# EAGLE board ffc_adapter_panel (EAGLE 9.4.2), part 1 of 2
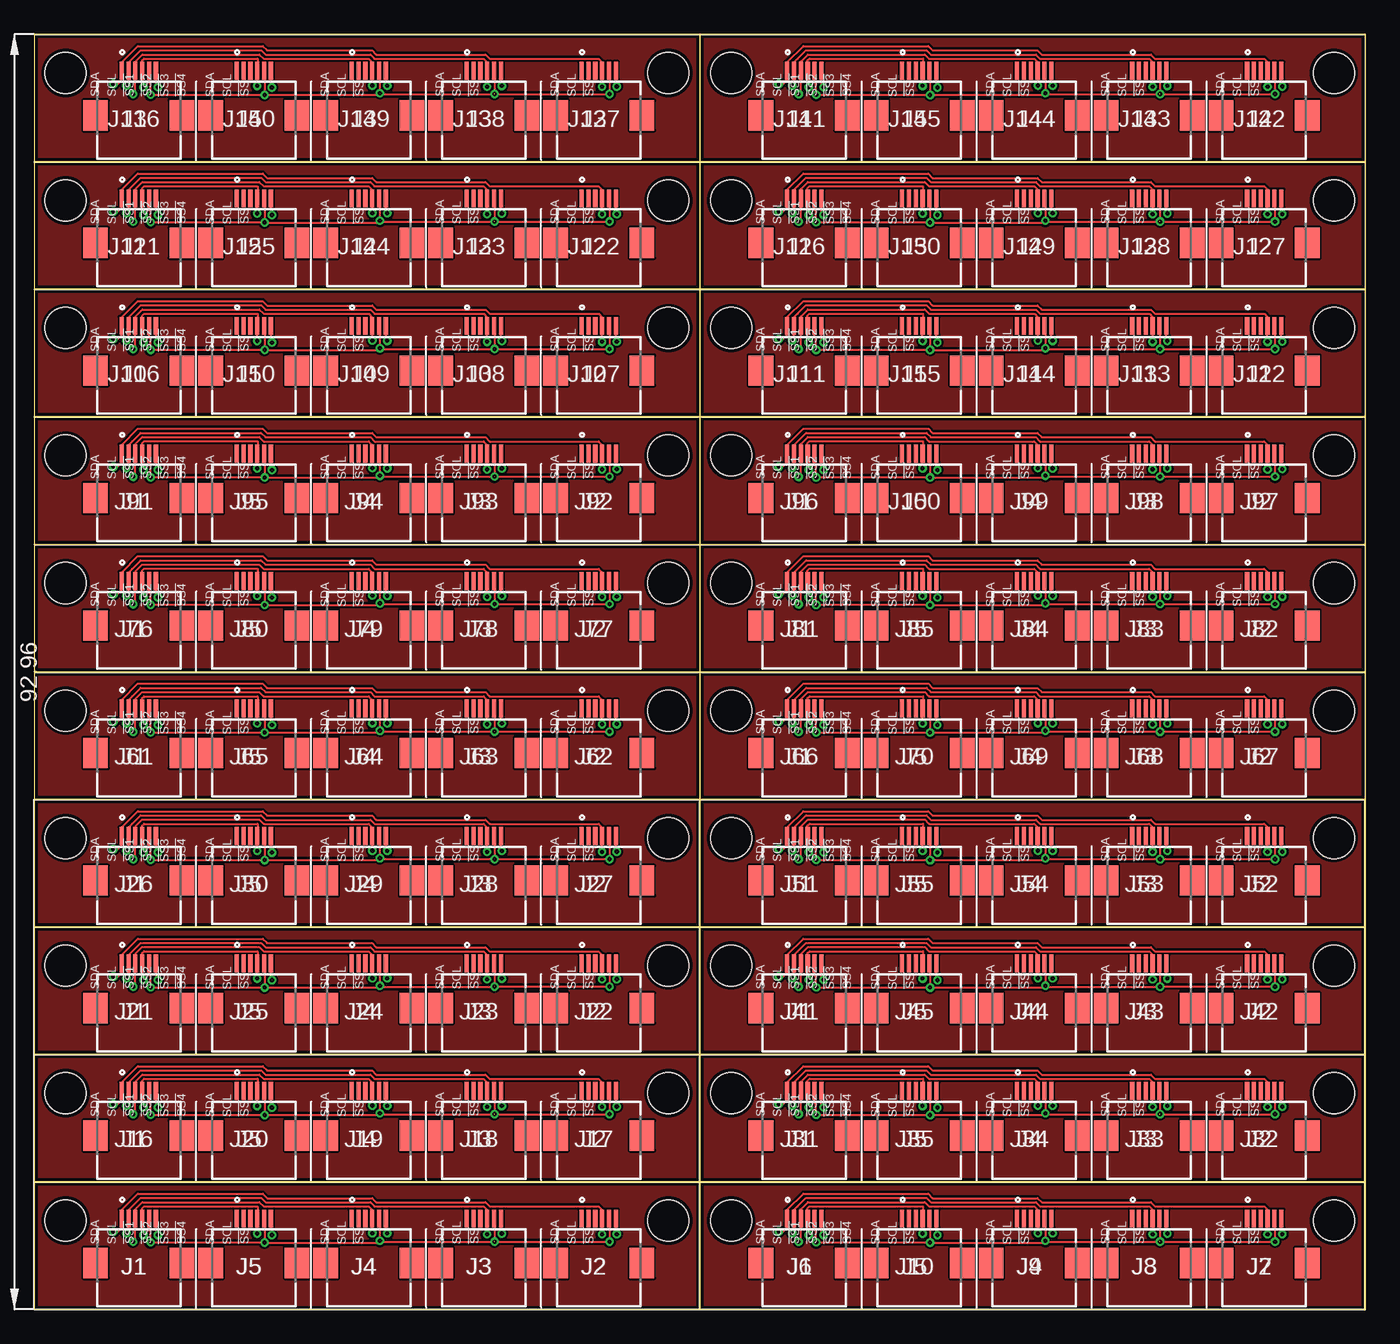
[diagram p0: board, top side]
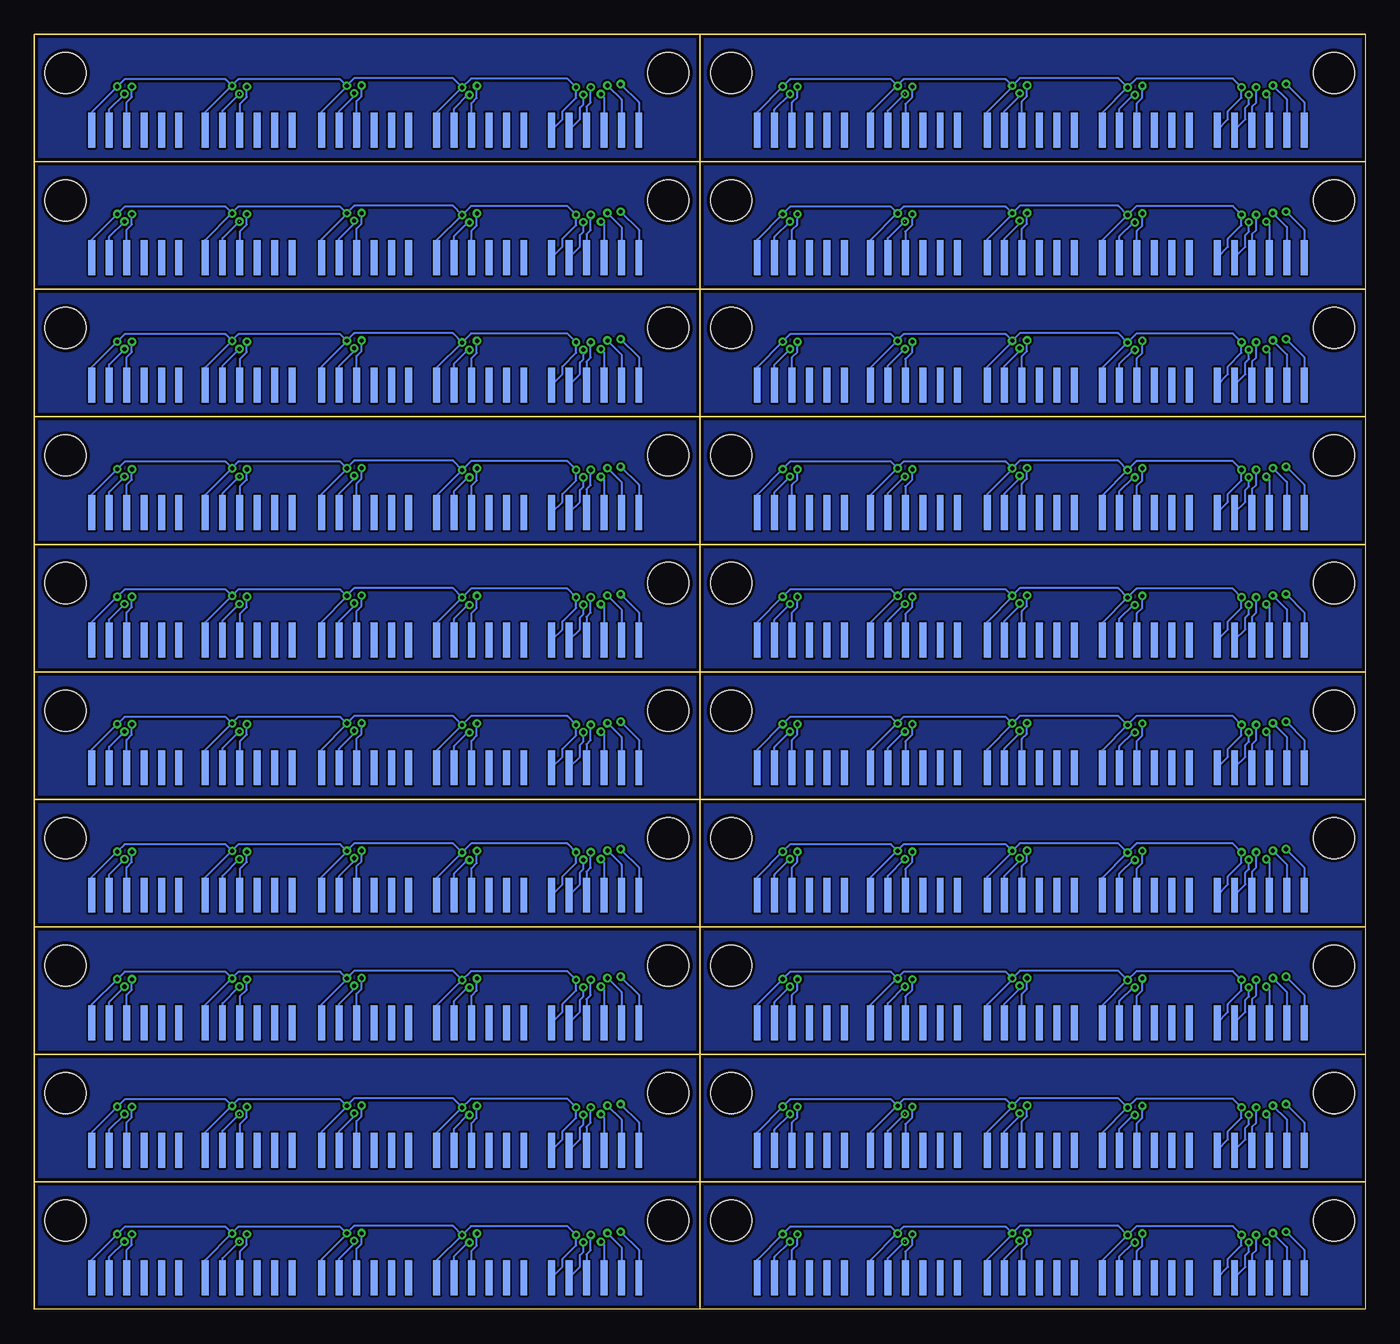
[diagram p1: board, bottom side, seen from below]

Size 97.03 x 92.96 mm. Coordinates in mm from the lower left corner, seen from the top.
Outline: 48.51,0 0,0 0,9.3
Outline: 48.51,0 48.51,9.3
Outline: 48.51,9.3 0,9.3
Outline: 48.51,0 97.03,0
Outline: 97.03,0 97.03,9.3
Outline: 97.03,9.3 48.51,9.3
Outline: 48.51,9.3 48.51,0
Outline: 97.03,9.3 97.03,0
Outline: 0,9.3 48.51,9.3
Outline: 48.51,9.3 48.51,18.59
Outline: 48.51,18.59 0,18.59
Outline: 0,18.59 0,9.3
Outline: 0,18.59 48.51,18.59
Outline: 48.51,18.59 48.51,27.89
Outline: 48.51,27.89 0,27.89
Outline: 0,27.89 0,18.59
Outline: 0,27.89 48.51,27.89
Outline: 48.51,27.89 48.51,37.19
Outline: 48.51,37.19 0,37.19
Outline: 0,37.19 0,27.89
Outline: 48.51,9.3 97.03,9.3
Outline: 97.03,9.3 97.03,18.59
Outline: 97.03,18.59 48.51,18.59
Outline: 48.51,18.59 48.51,9.3
Outline: 97.03,18.59 97.03,9.3
Outline: 48.51,18.59 97.03,18.59
Outline: 97.03,18.59 97.03,27.89
Outline: 97.03,27.89 48.51,27.89
Outline: 48.51,27.89 48.51,18.59
Outline: 97.03,27.89 97.03,18.59
Outline: 48.51,27.89 97.03,27.89
Outline: 97.03,27.89 97.03,37.19
Outline: 97.03,37.19 48.51,37.19
Outline: 48.51,37.19 48.51,27.89
Outline: 97.03,37.19 97.03,27.89
Outline: 0,37.19 48.51,37.19
Outline: 48.51,37.19 48.51,46.48
Outline: 48.51,46.48 0,46.48
Outline: 0,46.48 0,37.19
Outline: 48.51,37.19 97.03,37.19
Outline: 97.03,37.19 97.03,46.48
Outline: 97.03,46.48 48.51,46.48
Outline: 48.51,46.48 48.51,37.19
Outline: 97.03,46.48 97.03,37.19
Outline: 0,46.48 48.51,46.48
Outline: 48.51,46.48 48.51,55.78
Outline: 48.51,55.78 0,55.78
Outline: 0,55.78 0,46.48
Outline: 48.51,46.48 97.03,46.48
Outline: 97.03,46.48 97.03,55.78
Outline: 97.03,55.78 48.51,55.78
Outline: 48.51,55.78 48.51,46.48
Outline: 97.03,55.78 97.03,46.48
Outline: 0,55.78 48.51,55.78
Outline: 48.51,55.78 48.51,65.08
Outline: 48.51,65.08 0,65.08
Outline: 0,65.08 0,55.78
Outline: 48.51,55.78 97.03,55.78
Outline: 97.03,55.78 97.03,65.08
Outline: 97.03,65.08 48.51,65.08
Outline: 48.51,65.08 48.51,55.78
Outline: 97.03,65.08 97.03,55.78
Outline: 0,65.08 48.51,65.08
Outline: 48.51,65.08 48.51,74.37
Outline: 48.51,74.37 0,74.37
Outline: 0,74.37 0,65.08
Outline: 48.51,65.08 97.03,65.08
Outline: 97.03,65.08 97.03,74.37
Outline: 97.03,74.37 48.51,74.37
Outline: 48.51,74.37 48.51,65.08
Outline: 97.03,74.37 97.03,65.08
Outline: 0,74.37 48.51,74.37
Outline: 48.51,74.37 48.51,83.67
Outline: 48.51,83.67 0,83.67
Outline: 0,83.67 0,74.37
Outline: 48.51,74.37 97.03,74.37
Outline: 97.03,74.37 97.03,83.67
Outline: 97.03,83.67 48.51,83.67
Outline: 48.51,83.67 48.51,74.37
Outline: 97.03,83.67 97.03,74.37
Outline: 0,83.67 48.51,83.67
Outline: 48.51,83.67 48.51,92.96
Outline: 48.51,92.96 0,92.96
Outline: 0,92.96 0,83.67
Outline: 48.51,83.67 97.03,83.67
Outline: 97.03,83.67 97.03,92.96
Outline: 97.03,92.96 48.51,92.96
Outline: 48.51,92.96 48.51,83.67
Outline: 97.03,92.96 97.03,83.67
Outline: 0,92.96 48.51,92.96
Outline: 48.51,92.96 97.03,92.96
Copper layers (1*16): Top 0.035mm / dielectric 1.5mm / Bottom 0.035mm
Design rules "SeeedStudio_2layer_DRU_no_angle_20140221": minimum track width 6mil, minimum drill 12mil, track to track 6mil, track to pad 6mil, pad to pad 6mil, via to via 6mil, smd to smd 0mil, copper to edge 10mil, drill to drill 10mil, minimum pad ring 10mil, minimum via ring 6mil, stop-mask expansion 2mil, vias tented up to drill 100mil, thermal gap 10mil
Holes 3 mm at 2.29,6.48 46.23,6.48 50.8,6.48 94.74,6.48 2.29,15.77 46.23,15.77 2.29,25.07 46.23,25.07 2.29,34.37 46.23,34.37 50.8,15.77 94.74,15.77 50.8,25.07 94.74,25.07 50.8,34.37 94.74,34.37 2.29,43.66 46.23,43.66 50.8,43.66 94.74,43.66 2.29,52.96 46.23,52.96 50.8,52.96 94.74,52.96 2.29,62.26 46.23,62.26 50.8,62.26 94.74,62.26 2.29,71.55 46.23,71.55 50.8,71.55 94.74,71.55 2.29,80.85 46.23,80.85 50.8,80.85 94.74,80.85 2.29,90.14 46.23,90.14 50.8,90.14 94.74,90.14

## Footprints (pad centres in the part's own frame; a part is rotated, then mirrored left to right if it is on the bottom)
FH12-6S-0.5SH(55)_1 = smd 0.3 x 1.3: 1 -1.25,0; 2 -0.75,0; 3 -0.25,0; 4 0.25,0; 5 0.75,0; 6 1.25,0 | smd 1.8 x 2.2: 7 -3.15,-3.25; 8 3.15,-3.25
6PIN_SOLDER_PAD = smd 0.508 x 2.54: P$1 0,0; P$2 1.27,0; P$3 2.54,0; P$4 3.81,0; P$5 5.08,0; P$6 6.35,0

## Placement (x,y rotation side)
J1  FH12-6S-0.5SH(55)  [FH12-6S-0.5SH(55)_1]  7.62,6.63 0 top
J2  FH12-6S-0.5SH(55)  [FH12-6S-0.5SH(55)_1]  41.15,6.63 0 top
J3  FH12-6S-0.5SH(55)  [FH12-6S-0.5SH(55)_1]  32.77,6.63 0 top
J4  FH12-6S-0.5SH(55)  [FH12-6S-0.5SH(55)_1]  24.38,6.63 0 top
J5  FH12-6S-0.5SH(55)  [FH12-6S-0.5SH(55)_1]  16,6.63 0 top
J6  FH12-6S-0.5SH(55)  [FH12-6S-0.5SH(55)_1]  56.13,6.63 0 top
J7  FH12-6S-0.5SH(55)  [FH12-6S-0.5SH(55)_1]  89.66,6.63 0 top
J8  FH12-6S-0.5SH(55)  [FH12-6S-0.5SH(55)_1]  81.28,6.63 0 top
J9  FH12-6S-0.5SH(55)  [FH12-6S-0.5SH(55)_1]  72.9,6.63 0 top
J10  FH12-6S-0.5SH(55)  [FH12-6S-0.5SH(55)_1]  64.52,6.63 0 top
J16  FH12-6S-0.5SH(55)  [FH12-6S-0.5SH(55)_1]  7.62,15.93 0 top
J17  FH12-6S-0.5SH(55)  [FH12-6S-0.5SH(55)_1]  41.15,15.93 0 top
J18  FH12-6S-0.5SH(55)  [FH12-6S-0.5SH(55)_1]  32.77,15.93 0 top
J19  FH12-6S-0.5SH(55)  [FH12-6S-0.5SH(55)_1]  24.38,15.93 0 top
J20  FH12-6S-0.5SH(55)  [FH12-6S-0.5SH(55)_1]  16,15.93 0 top
J21  FH12-6S-0.5SH(55)  [FH12-6S-0.5SH(55)_1]  7.62,25.22 0 top
J22  FH12-6S-0.5SH(55)  [FH12-6S-0.5SH(55)_1]  41.15,25.22 0 top
J23  FH12-6S-0.5SH(55)  [FH12-6S-0.5SH(55)_1]  32.77,25.22 0 top
J24  FH12-6S-0.5SH(55)  [FH12-6S-0.5SH(55)_1]  24.38,25.22 0 top
J25  FH12-6S-0.5SH(55)  [FH12-6S-0.5SH(55)_1]  16,25.22 0 top
J26  FH12-6S-0.5SH(55)  [FH12-6S-0.5SH(55)_1]  7.62,34.52 0 top
J27  FH12-6S-0.5SH(55)  [FH12-6S-0.5SH(55)_1]  41.15,34.52 0 top
J28  FH12-6S-0.5SH(55)  [FH12-6S-0.5SH(55)_1]  32.77,34.52 0 top
J29  FH12-6S-0.5SH(55)  [FH12-6S-0.5SH(55)_1]  24.38,34.52 0 top
J30  FH12-6S-0.5SH(55)  [FH12-6S-0.5SH(55)_1]  16,34.52 0 top
J31  FH12-6S-0.5SH(55)  [FH12-6S-0.5SH(55)_1]  56.13,15.93 0 top
J32  FH12-6S-0.5SH(55)  [FH12-6S-0.5SH(55)_1]  89.66,15.93 0 top
J33  FH12-6S-0.5SH(55)  [FH12-6S-0.5SH(55)_1]  81.28,15.93 0 top
J34  FH12-6S-0.5SH(55)  [FH12-6S-0.5SH(55)_1]  72.9,15.93 0 top
J35  FH12-6S-0.5SH(55)  [FH12-6S-0.5SH(55)_1]  64.52,15.93 0 top
J41  FH12-6S-0.5SH(55)  [FH12-6S-0.5SH(55)_1]  56.13,25.22 0 top
J42  FH12-6S-0.5SH(55)  [FH12-6S-0.5SH(55)_1]  89.66,25.22 0 top
J43  FH12-6S-0.5SH(55)  [FH12-6S-0.5SH(55)_1]  81.28,25.22 0 top
J44  FH12-6S-0.5SH(55)  [FH12-6S-0.5SH(55)_1]  72.9,25.22 0 top
J45  FH12-6S-0.5SH(55)  [FH12-6S-0.5SH(55)_1]  64.52,25.22 0 top
J51  FH12-6S-0.5SH(55)  [FH12-6S-0.5SH(55)_1]  56.13,34.52 0 top
J52  FH12-6S-0.5SH(55)  [FH12-6S-0.5SH(55)_1]  89.66,34.52 0 top
J53  FH12-6S-0.5SH(55)  [FH12-6S-0.5SH(55)_1]  81.28,34.52 0 top
J54  FH12-6S-0.5SH(55)  [FH12-6S-0.5SH(55)_1]  72.9,34.52 0 top
J55  FH12-6S-0.5SH(55)  [FH12-6S-0.5SH(55)_1]  64.52,34.52 0 top
J61  FH12-6S-0.5SH(55)  [FH12-6S-0.5SH(55)_1]  7.62,43.81 0 top
J62  FH12-6S-0.5SH(55)  [FH12-6S-0.5SH(55)_1]  41.15,43.81 0 top
J63  FH12-6S-0.5SH(55)  [FH12-6S-0.5SH(55)_1]  32.77,43.81 0 top
J64  FH12-6S-0.5SH(55)  [FH12-6S-0.5SH(55)_1]  24.38,43.81 0 top
J65  FH12-6S-0.5SH(55)  [FH12-6S-0.5SH(55)_1]  16,43.81 0 top
J66  FH12-6S-0.5SH(55)  [FH12-6S-0.5SH(55)_1]  56.13,43.81 0 top
J67  FH12-6S-0.5SH(55)  [FH12-6S-0.5SH(55)_1]  89.66,43.81 0 top
J68  FH12-6S-0.5SH(55)  [FH12-6S-0.5SH(55)_1]  81.28,43.81 0 top
J69  FH12-6S-0.5SH(55)  [FH12-6S-0.5SH(55)_1]  72.9,43.81 0 top
J70  FH12-6S-0.5SH(55)  [FH12-6S-0.5SH(55)_1]  64.52,43.81 0 top
J76  FH12-6S-0.5SH(55)  [FH12-6S-0.5SH(55)_1]  7.62,53.11 0 top
J77  FH12-6S-0.5SH(55)  [FH12-6S-0.5SH(55)_1]  41.15,53.11 0 top
J78  FH12-6S-0.5SH(55)  [FH12-6S-0.5SH(55)_1]  32.77,53.11 0 top
J79  FH12-6S-0.5SH(55)  [FH12-6S-0.5SH(55)_1]  24.38,53.11 0 top
J80  FH12-6S-0.5SH(55)  [FH12-6S-0.5SH(55)_1]  16,53.11 0 top
J81  FH12-6S-0.5SH(55)  [FH12-6S-0.5SH(55)_1]  56.13,53.11 0 top
J82  FH12-6S-0.5SH(55)  [FH12-6S-0.5SH(55)_1]  89.66,53.11 0 top
J83  FH12-6S-0.5SH(55)  [FH12-6S-0.5SH(55)_1]  81.28,53.11 0 top
J84  FH12-6S-0.5SH(55)  [FH12-6S-0.5SH(55)_1]  72.9,53.11 0 top
J85  FH12-6S-0.5SH(55)  [FH12-6S-0.5SH(55)_1]  64.52,53.11 0 top
J91  FH12-6S-0.5SH(55)  [FH12-6S-0.5SH(55)_1]  7.62,62.41 0 top
J92  FH12-6S-0.5SH(55)  [FH12-6S-0.5SH(55)_1]  41.15,62.41 0 top
J93  FH12-6S-0.5SH(55)  [FH12-6S-0.5SH(55)_1]  32.77,62.41 0 top
J94  FH12-6S-0.5SH(55)  [FH12-6S-0.5SH(55)_1]  24.38,62.41 0 top
J95  FH12-6S-0.5SH(55)  [FH12-6S-0.5SH(55)_1]  16,62.41 0 top
J96  FH12-6S-0.5SH(55)  [FH12-6S-0.5SH(55)_1]  56.13,62.41 0 top
J97  FH12-6S-0.5SH(55)  [FH12-6S-0.5SH(55)_1]  89.66,62.41 0 top
J98  FH12-6S-0.5SH(55)  [FH12-6S-0.5SH(55)_1]  81.28,62.41 0 top
J99  FH12-6S-0.5SH(55)  [FH12-6S-0.5SH(55)_1]  72.9,62.41 0 top
J100  FH12-6S-0.5SH(55)  [FH12-6S-0.5SH(55)_1]  64.52,62.41 0 top
J106  FH12-6S-0.5SH(55)  [FH12-6S-0.5SH(55)_1]  7.62,71.7 0 top
J107  FH12-6S-0.5SH(55)  [FH12-6S-0.5SH(55)_1]  41.15,71.7 0 top
J108  FH12-6S-0.5SH(55)  [FH12-6S-0.5SH(55)_1]  32.77,71.7 0 top
J109  FH12-6S-0.5SH(55)  [FH12-6S-0.5SH(55)_1]  24.38,71.7 0 top
J110  FH12-6S-0.5SH(55)  [FH12-6S-0.5SH(55)_1]  16,71.7 0 top
J111  FH12-6S-0.5SH(55)  [FH12-6S-0.5SH(55)_1]  56.13,71.7 0 top
J112  FH12-6S-0.5SH(55)  [FH12-6S-0.5SH(55)_1]  89.66,71.7 0 top
J113  FH12-6S-0.5SH(55)  [FH12-6S-0.5SH(55)_1]  81.28,71.7 0 top
J114  FH12-6S-0.5SH(55)  [FH12-6S-0.5SH(55)_1]  72.9,71.7 0 top
J115  FH12-6S-0.5SH(55)  [FH12-6S-0.5SH(55)_1]  64.52,71.7 0 top
J121  FH12-6S-0.5SH(55)  [FH12-6S-0.5SH(55)_1]  7.62,81 0 top
J122  FH12-6S-0.5SH(55)  [FH12-6S-0.5SH(55)_1]  41.15,81 0 top
J123  FH12-6S-0.5SH(55)  [FH12-6S-0.5SH(55)_1]  32.77,81 0 top
J124  FH12-6S-0.5SH(55)  [FH12-6S-0.5SH(55)_1]  24.38,81 0 top
J125  FH12-6S-0.5SH(55)  [FH12-6S-0.5SH(55)_1]  16,81 0 top
J126  FH12-6S-0.5SH(55)  [FH12-6S-0.5SH(55)_1]  56.13,81 0 top
J127  FH12-6S-0.5SH(55)  [FH12-6S-0.5SH(55)_1]  89.66,81 0 top
J128  FH12-6S-0.5SH(55)  [FH12-6S-0.5SH(55)_1]  81.28,81 0 top
J129  FH12-6S-0.5SH(55)  [FH12-6S-0.5SH(55)_1]  72.9,81 0 top
J130  FH12-6S-0.5SH(55)  [FH12-6S-0.5SH(55)_1]  64.52,81 0 top
J136  FH12-6S-0.5SH(55)  [FH12-6S-0.5SH(55)_1]  7.62,90.3 0 top
J137  FH12-6S-0.5SH(55)  [FH12-6S-0.5SH(55)_1]  41.15,90.3 0 top
J138  FH12-6S-0.5SH(55)  [FH12-6S-0.5SH(55)_1]  32.77,90.3 0 top
J139  FH12-6S-0.5SH(55)  [FH12-6S-0.5SH(55)_1]  24.38,90.3 0 top
J140  FH12-6S-0.5SH(55)  [FH12-6S-0.5SH(55)_1]  16,90.3 0 top
J141  FH12-6S-0.5SH(55)  [FH12-6S-0.5SH(55)_1]  56.13,90.3 0 top
J142  FH12-6S-0.5SH(55)  [FH12-6S-0.5SH(55)_1]  89.66,90.3 0 top
J143  FH12-6S-0.5SH(55)  [FH12-6S-0.5SH(55)_1]  81.28,90.3 0 top
J144  FH12-6S-0.5SH(55)  [FH12-6S-0.5SH(55)_1]  72.9,90.3 0 top
J145  FH12-6S-0.5SH(55)  [FH12-6S-0.5SH(55)_1]  64.52,90.3 0 top
U$1  6PIN_SOLDER_PAD  [6PIN_SOLDER_PAD]  44.32,2.31 0 bottom
U$2  6PIN_SOLDER_PAD  [6PIN_SOLDER_PAD]  36.07,2.31 0 bottom
U$3  6PIN_SOLDER_PAD  [6PIN_SOLDER_PAD]  27.56,2.31 0 bottom
U$4  6PIN_SOLDER_PAD  [6PIN_SOLDER_PAD]  10.79,2.31 0 bottom
U$5  6PIN_SOLDER_PAD  [6PIN_SOLDER_PAD]  19.18,2.31 0 bottom
U$6  6PIN_SOLDER_PAD  [6PIN_SOLDER_PAD]  59.31,2.31 0 bottom
U$7  6PIN_SOLDER_PAD  [6PIN_SOLDER_PAD]  92.84,2.31 0 bottom
U$8  6PIN_SOLDER_PAD  [6PIN_SOLDER_PAD]  84.58,2.31 0 bottom
U$9  6PIN_SOLDER_PAD  [6PIN_SOLDER_PAD]  76.07,2.31 0 bottom
U$10  6PIN_SOLDER_PAD  [6PIN_SOLDER_PAD]  67.69,2.31 0 bottom
U$16  6PIN_SOLDER_PAD  [6PIN_SOLDER_PAD]  10.79,11.61 0 bottom
U$17  6PIN_SOLDER_PAD  [6PIN_SOLDER_PAD]  44.32,11.61 0 bottom
U$18  6PIN_SOLDER_PAD  [6PIN_SOLDER_PAD]  36.07,11.61 0 bottom
U$19  6PIN_SOLDER_PAD  [6PIN_SOLDER_PAD]  27.56,11.61 0 bottom
U$20  6PIN_SOLDER_PAD  [6PIN_SOLDER_PAD]  19.18,11.61 0 bottom
U$21  6PIN_SOLDER_PAD  [6PIN_SOLDER_PAD]  10.79,20.9 0 bottom
U$22  6PIN_SOLDER_PAD  [6PIN_SOLDER_PAD]  44.32,20.9 0 bottom
U$23  6PIN_SOLDER_PAD  [6PIN_SOLDER_PAD]  36.07,20.9 0 bottom
U$24  6PIN_SOLDER_PAD  [6PIN_SOLDER_PAD]  27.56,20.9 0 bottom
U$25  6PIN_SOLDER_PAD  [6PIN_SOLDER_PAD]  19.18,20.9 0 bottom
U$26  6PIN_SOLDER_PAD  [6PIN_SOLDER_PAD]  10.79,30.2 0 bottom
U$27  6PIN_SOLDER_PAD  [6PIN_SOLDER_PAD]  44.32,30.2 0 bottom
U$28  6PIN_SOLDER_PAD  [6PIN_SOLDER_PAD]  36.07,30.2 0 bottom
U$29  6PIN_SOLDER_PAD  [6PIN_SOLDER_PAD]  27.56,30.2 0 bottom
U$30  6PIN_SOLDER_PAD  [6PIN_SOLDER_PAD]  19.18,30.2 0 bottom
U$31  6PIN_SOLDER_PAD  [6PIN_SOLDER_PAD]  59.31,11.61 0 bottom
U$32  6PIN_SOLDER_PAD  [6PIN_SOLDER_PAD]  92.84,11.61 0 bottom
U$33  6PIN_SOLDER_PAD  [6PIN_SOLDER_PAD]  84.58,11.61 0 bottom
U$34  6PIN_SOLDER_PAD  [6PIN_SOLDER_PAD]  76.07,11.61 0 bottom
U$35  6PIN_SOLDER_PAD  [6PIN_SOLDER_PAD]  67.69,11.61 0 bottom
U$41  6PIN_SOLDER_PAD  [6PIN_SOLDER_PAD]  59.31,20.9 0 bottom
U$42  6PIN_SOLDER_PAD  [6PIN_SOLDER_PAD]  92.84,20.9 0 bottom
U$43  6PIN_SOLDER_PAD  [6PIN_SOLDER_PAD]  84.58,20.9 0 bottom
U$44  6PIN_SOLDER_PAD  [6PIN_SOLDER_PAD]  76.07,20.9 0 bottom
U$45  6PIN_SOLDER_PAD  [6PIN_SOLDER_PAD]  67.69,20.9 0 bottom
U$51  6PIN_SOLDER_PAD  [6PIN_SOLDER_PAD]  59.31,30.2 0 bottom
U$52  6PIN_SOLDER_PAD  [6PIN_SOLDER_PAD]  92.84,30.2 0 bottom
U$53  6PIN_SOLDER_PAD  [6PIN_SOLDER_PAD]  84.58,30.2 0 bottom
U$54  6PIN_SOLDER_PAD  [6PIN_SOLDER_PAD]  76.07,30.2 0 bottom
U$55  6PIN_SOLDER_PAD  [6PIN_SOLDER_PAD]  67.69,30.2 0 bottom
U$61  6PIN_SOLDER_PAD  [6PIN_SOLDER_PAD]  10.79,39.5 0 bottom
U$62  6PIN_SOLDER_PAD  [6PIN_SOLDER_PAD]  44.32,39.5 0 bottom
U$63  6PIN_SOLDER_PAD  [6PIN_SOLDER_PAD]  36.07,39.5 0 bottom
U$64  6PIN_SOLDER_PAD  [6PIN_SOLDER_PAD]  27.56,39.5 0 bottom
U$65  6PIN_SOLDER_PAD  [6PIN_SOLDER_PAD]  19.18,39.5 0 bottom
U$66  6PIN_SOLDER_PAD  [6PIN_SOLDER_PAD]  59.31,39.5 0 bottom
U$67  6PIN_SOLDER_PAD  [6PIN_SOLDER_PAD]  92.84,39.5 0 bottom
U$68  6PIN_SOLDER_PAD  [6PIN_SOLDER_PAD]  84.58,39.5 0 bottom
U$69  6PIN_SOLDER_PAD  [6PIN_SOLDER_PAD]  76.07,39.5 0 bottom
U$70  6PIN_SOLDER_PAD  [6PIN_SOLDER_PAD]  67.69,39.5 0 bottom
U$76  6PIN_SOLDER_PAD  [6PIN_SOLDER_PAD]  10.79,48.79 0 bottom
U$77  6PIN_SOLDER_PAD  [6PIN_SOLDER_PAD]  44.32,48.79 0 bottom
U$78  6PIN_SOLDER_PAD  [6PIN_SOLDER_PAD]  36.07,48.79 0 bottom
U$79  6PIN_SOLDER_PAD  [6PIN_SOLDER_PAD]  27.56,48.79 0 bottom
U$80  6PIN_SOLDER_PAD  [6PIN_SOLDER_PAD]  19.18,48.79 0 bottom
U$81  6PIN_SOLDER_PAD  [6PIN_SOLDER_PAD]  59.31,48.79 0 bottom
U$82  6PIN_SOLDER_PAD  [6PIN_SOLDER_PAD]  92.84,48.79 0 bottom
U$83  6PIN_SOLDER_PAD  [6PIN_SOLDER_PAD]  84.58,48.79 0 bottom
U$84  6PIN_SOLDER_PAD  [6PIN_SOLDER_PAD]  76.07,48.79 0 bottom
U$85  6PIN_SOLDER_PAD  [6PIN_SOLDER_PAD]  67.69,48.79 0 bottom
U$91  6PIN_SOLDER_PAD  [6PIN_SOLDER_PAD]  10.79,58.09 0 bottom
U$92  6PIN_SOLDER_PAD  [6PIN_SOLDER_PAD]  44.32,58.09 0 bottom
U$93  6PIN_SOLDER_PAD  [6PIN_SOLDER_PAD]  36.07,58.09 0 bottom
U$94  6PIN_SOLDER_PAD  [6PIN_SOLDER_PAD]  27.56,58.09 0 bottom
U$95  6PIN_SOLDER_PAD  [6PIN_SOLDER_PAD]  19.18,58.09 0 bottom
U$96  6PIN_SOLDER_PAD  [6PIN_SOLDER_PAD]  59.31,58.09 0 bottom
U$97  6PIN_SOLDER_PAD  [6PIN_SOLDER_PAD]  92.84,58.09 0 bottom
U$98  6PIN_SOLDER_PAD  [6PIN_SOLDER_PAD]  84.58,58.09 0 bottom
U$99  6PIN_SOLDER_PAD  [6PIN_SOLDER_PAD]  76.07,58.09 0 bottom
U$100  6PIN_SOLDER_PAD  [6PIN_SOLDER_PAD]  67.69,58.09 0 bottom
U$106  6PIN_SOLDER_PAD  [6PIN_SOLDER_PAD]  10.79,67.39 0 bottom
U$107  6PIN_SOLDER_PAD  [6PIN_SOLDER_PAD]  44.32,67.39 0 bottom
U$108  6PIN_SOLDER_PAD  [6PIN_SOLDER_PAD]  36.07,67.39 0 bottom
U$109  6PIN_SOLDER_PAD  [6PIN_SOLDER_PAD]  27.56,67.39 0 bottom
U$110  6PIN_SOLDER_PAD  [6PIN_SOLDER_PAD]  19.18,67.39 0 bottom
U$111  6PIN_SOLDER_PAD  [6PIN_SOLDER_PAD]  59.31,67.39 0 bottom
U$112  6PIN_SOLDER_PAD  [6PIN_SOLDER_PAD]  92.84,67.39 0 bottom
U$113  6PIN_SOLDER_PAD  [6PIN_SOLDER_PAD]  84.58,67.39 0 bottom
U$114  6PIN_SOLDER_PAD  [6PIN_SOLDER_PAD]  76.07,67.39 0 bottom
U$115  6PIN_SOLDER_PAD  [6PIN_SOLDER_PAD]  67.69,67.39 0 bottom
U$121  6PIN_SOLDER_PAD  [6PIN_SOLDER_PAD]  10.79,76.68 0 bottom
U$122  6PIN_SOLDER_PAD  [6PIN_SOLDER_PAD]  44.32,76.68 0 bottom
U$123  6PIN_SOLDER_PAD  [6PIN_SOLDER_PAD]  36.07,76.68 0 bottom
U$124  6PIN_SOLDER_PAD  [6PIN_SOLDER_PAD]  27.56,76.68 0 bottom
U$125  6PIN_SOLDER_PAD  [6PIN_SOLDER_PAD]  19.18,76.68 0 bottom
U$126  6PIN_SOLDER_PAD  [6PIN_SOLDER_PAD]  59.31,76.68 0 bottom
U$127  6PIN_SOLDER_PAD  [6PIN_SOLDER_PAD]  92.84,76.68 0 bottom
U$128  6PIN_SOLDER_PAD  [6PIN_SOLDER_PAD]  84.58,76.68 0 bottom
U$129  6PIN_SOLDER_PAD  [6PIN_SOLDER_PAD]  76.07,76.68 0 bottom
U$130  6PIN_SOLDER_PAD  [6PIN_SOLDER_PAD]  67.69,76.68 0 bottom
U$136  6PIN_SOLDER_PAD  [6PIN_SOLDER_PAD]  10.79,85.98 0 bottom
U$137  6PIN_SOLDER_PAD  [6PIN_SOLDER_PAD]  44.32,85.98 0 bottom
U$138  6PIN_SOLDER_PAD  [6PIN_SOLDER_PAD]  36.07,85.98 0 bottom
U$139  6PIN_SOLDER_PAD  [6PIN_SOLDER_PAD]  27.56,85.98 0 bottom
U$140  6PIN_SOLDER_PAD  [6PIN_SOLDER_PAD]  19.18,85.98 0 bottom
U$141  6PIN_SOLDER_PAD  [6PIN_SOLDER_PAD]  59.31,85.98 0 bottom
U$142  6PIN_SOLDER_PAD  [6PIN_SOLDER_PAD]  92.84,85.98 0 bottom
U$143  6PIN_SOLDER_PAD  [6PIN_SOLDER_PAD]  84.58,85.98 0 bottom
U$144  6PIN_SOLDER_PAD  [6PIN_SOLDER_PAD]  76.07,85.98 0 bottom
U$145  6PIN_SOLDER_PAD  [6PIN_SOLDER_PAD]  67.69,85.98 0 bottom

## Library data of the parts
J1-J10 J16-J35 J41-J45 J51-J55 J61-J70 J76-J85 J91-J100 J106-J115 J121-J130 J136-J145 = FH12-6S-0.5SH(55); DESCRIPTION: HIROSE(HRS) - FH12-6S-0.5SH(55) - FFC/FPC CONNECTOR, RECEPTACLE, 6POS 1ROW; HEIGHT: mm; MANUFACTURER_NAME: Hirose; MANUFACTURER_PART_NUMBER: FH12-6S-0.5SH(55); MOUSER_PART_NUMBER: 798-FH12-6S-0.5SH55; MOUSER_PRICE-STOCK: https://www.mouser.com/Search/Refine.aspx?Keyword=798-FH12-6S-0.5SH55; RS_PART_NUMBER: 7388811P; RS_PRICE-STOCK: http://uk.rs-online.com/web/p/products/7388811P
U$1-U$10 U$16-U$35 U$41-U$45 U$51-U$55 U$61-U$70 U$76-U$85 U$91-U$100 U$106-U$115 U$121-U$130 U$136-U$145 = edge

## Nets
!SS1: J1.4 J5.4 U$4.P$3 U$5.P$3
!SS2: J1.3 J4.4 U$3.P$3 U$4.P$4
!SS3: J1.2 J3.4 U$2.P$3 U$4.P$5
!SS4: J1.1 J2.4 U$1.P$3 U$4.P$6
!SS5: J6.4 J10.4 U$6.P$3 U$10.P$3
!SS6: J6.3 J9.4 U$6.P$4 U$9.P$3
!SS7: J6.2 J8.4 U$6.P$5 U$8.P$3
!SS8: J6.1 J7.4 U$6.P$6 U$7.P$3
!SS13: J16.4 J20.4 U$16.P$3 U$20.P$3
!SS14: J16.3 J19.4 U$16.P$4 U$19.P$3
!SS15: J16.2 J18.4 U$16.P$5 U$18.P$3
!SS16: J16.1 J17.4 U$16.P$6 U$17.P$3
!SS17: J21.4 J25.4 U$21.P$3 U$25.P$3
!SS18: J21.3 J24.4 U$21.P$4 U$24.P$3
!SS19: J21.2 J23.4 U$21.P$5 U$23.P$3
!SS20: J21.1 J22.4 U$21.P$6 U$22.P$3
!SS21: J26.4 J30.4 U$26.P$3 U$30.P$3
!SS22: J26.3 J29.4 U$26.P$4 U$29.P$3
!SS23: J26.2 J28.4 U$26.P$5 U$28.P$3
!SS24: J26.1 J27.4 U$26.P$6 U$27.P$3
!SS25: J31.4 J35.4 U$31.P$3 U$35.P$3
!SS26: J31.3 J34.4 U$31.P$4 U$34.P$3
!SS27: J31.2 J33.4 U$31.P$5 U$33.P$3
!SS28: J31.1 J32.4 U$31.P$6 U$32.P$3
!SS33: J41.4 J45.4 U$41.P$3 U$45.P$3
!SS34: J41.3 J44.4 U$41.P$4 U$44.P$3
!SS35: J41.2 J43.4 U$41.P$5 U$43.P$3
!SS36: J41.1 J42.4 U$41.P$6 U$42.P$3
!SS41: J51.4 J55.4 U$51.P$3 U$55.P$3
!SS42: J51.3 J54.4 U$51.P$4 U$54.P$3
!SS43: J51.2 J53.4 U$51.P$5 U$53.P$3
!SS44: J51.1 J52.4 U$51.P$6 U$52.P$3
!SS49: J61.4 J65.4 U$61.P$3 U$65.P$3
!SS50: J61.3 J64.4 U$61.P$4 U$64.P$3
!SS51: J61.2 J63.4 U$61.P$5 U$63.P$3
!SS52: J61.1 J62.4 U$61.P$6 U$62.P$3
!SS53: J66.4 J70.4 U$66.P$3 U$70.P$3
!SS54: J66.3 J69.4 U$66.P$4 U$69.P$3
!SS55: J66.2 J68.4 U$66.P$5 U$68.P$3
!SS56: J66.1 J67.4 U$66.P$6 U$67.P$3
!SS61: J76.4 J80.4 U$76.P$3 U$80.P$3
!SS62: J76.3 J79.4 U$76.P$4 U$79.P$3
!SS63: J76.2 J78.4 U$76.P$5 U$78.P$3
!SS64: J76.1 J77.4 U$76.P$6 U$77.P$3
!SS65: J81.4 J85.4 U$81.P$3 U$85.P$3
!SS66: J81.3 J84.4 U$81.P$4 U$84.P$3
!SS67: J81.2 J83.4 U$81.P$5 U$83.P$3
!SS68: J81.1 J82.4 U$81.P$6 U$82.P$3
!SS73: J91.4 J95.4 U$91.P$3 U$95.P$3
!SS74: J91.3 J94.4 U$91.P$4 U$94.P$3
!SS75: J91.2 J93.4 U$91.P$5 U$93.P$3
!SS76: J91.1 J92.4 U$91.P$6 U$92.P$3
!SS77: J96.4 J100.4 U$96.P$3 U$100.P$3
!SS78: J96.3 J99.4 U$96.P$4 U$99.P$3
!SS79: J96.2 J98.4 U$96.P$5 U$98.P$3
!SS80: J96.1 J97.4 U$96.P$6 U$97.P$3
!SS85: J106.4 J110.4 U$106.P$3 U$110.P$3
!SS86: J106.3 J109.4 U$106.P$4 U$109.P$3
!SS87: J106.2 J108.4 U$106.P$5 U$108.P$3
!SS88: J106.1 J107.4 U$106.P$6 U$107.P$3
!SS89: J111.4 J115.4 U$111.P$3 U$115.P$3
!SS90: J111.3 J114.4 U$111.P$4 U$114.P$3
!SS91: J111.2 J113.4 U$111.P$5 U$113.P$3
!SS92: J111.1 J112.4 U$111.P$6 U$112.P$3
!SS97: J121.4 J125.4 U$121.P$3 U$125.P$3
!SS98: J121.3 J124.4 U$121.P$4 U$124.P$3
!SS99: J121.2 J123.4 U$121.P$5 U$123.P$3
!SS100: J121.1 J122.4 U$121.P$6 U$122.P$3
!SS101: J126.4 J130.4 U$126.P$3 U$130.P$3
!SS102: J126.3 J129.4 U$126.P$4 U$129.P$3
!SS103: J126.2 J128.4 U$126.P$5 U$128.P$3
!SS104: J126.1 J127.4 U$126.P$6 U$127.P$3
!SS109: J136.4 J140.4 U$136.P$3 U$140.P$3
!SS110: J136.3 J139.4 U$136.P$4 U$139.P$3
!SS111: J136.2 J138.4 U$136.P$5 U$138.P$3
!SS112: J136.1 J137.4 U$136.P$6 U$137.P$3
!SS113: J141.4 J145.4 U$141.P$3 U$145.P$3
!SS114: J141.3 J144.4 U$141.P$4 U$144.P$3
!SS115: J141.2 J143.4 U$141.P$5 U$143.P$3
!SS116: J141.1 J142.4 U$141.P$6 U$142.P$3
SCL: J1.5 J2.5 J3.5 J4.5 J5.5 U$1.P$2 U$2.P$2 U$3.P$2 U$4.P$2 U$5.P$2
SCL1: J6.5 J7.5 J8.5 J9.5 J10.5 U$6.P$2 U$7.P$2 U$8.P$2 U$9.P$2 U$10.P$2
SCL3: J16.5 J17.5 J18.5 J19.5 J20.5 U$16.P$2 U$17.P$2 U$18.P$2 U$19.P$2 U$20.P$2
SCL4: J21.5 J22.5 J23.5 J24.5 J25.5 U$21.P$2 U$22.P$2 U$23.P$2 U$24.P$2 U$25.P$2
SCL5: J26.5 J27.5 J28.5 J29.5 J30.5 U$26.P$2 U$27.P$2 U$28.P$2 U$29.P$2 U$30.P$2
SCL6: J31.5 J32.5 J33.5 J34.5 J35.5 U$31.P$2 U$32.P$2 U$33.P$2 U$34.P$2 U$35.P$2
SCL8: J41.5 J42.5 J43.5 J44.5 J45.5 U$41.P$2 U$42.P$2 U$43.P$2 U$44.P$2 U$45.P$2
SCL10: J51.5 J52.5 J53.5 J54.5 J55.5 U$51.P$2 U$52.P$2 U$53.P$2 U$54.P$2 U$55.P$2
SCL12: J61.5 J62.5 J63.5 J64.5 J65.5 U$61.P$2 U$62.P$2 U$63.P$2 U$64.P$2 U$65.P$2
SCL13: J66.5 J67.5 J68.5 J69.5 J70.5 U$66.P$2 U$67.P$2 U$68.P$2 U$69.P$2 U$70.P$2
SCL15: J76.5 J77.5 J78.5 J79.5 J80.5 U$76.P$2 U$77.P$2 U$78.P$2 U$79.P$2 U$80.P$2
SCL16: J81.5 J82.5 J83.5 J84.5 J85.5 U$81.P$2 U$82.P$2 U$83.P$2 U$84.P$2 U$85.P$2
SCL18: J91.5 J92.5 J93.5 J94.5 J95.5 U$91.P$2 U$92.P$2 U$93.P$2 U$94.P$2 U$95.P$2
SCL19: J96.5 J97.5 J98.5 J99.5 J100.5 U$96.P$2 U$97.P$2 U$98.P$2 U$99.P$2 U$100.P$2
SCL21: J106.5 J107.5 J108.5 J109.5 J110.5 U$106.P$2 U$107.P$2 U$108.P$2 U$109.P$2 U$110.P$2
SCL22: J111.5 J112.5 J113.5 J114.5 J115.5 U$111.P$2 U$112.P$2 U$113.P$2 U$114.P$2 U$115.P$2
SCL24: J121.5 J122.5 J123.5 J124.5 J125.5 U$121.P$2 U$122.P$2 U$123.P$2 U$124.P$2 U$125.P$2
SCL25: J126.5 J127.5 J128.5 J129.5 J130.5 U$126.P$2 U$127.P$2 U$128.P$2 U$129.P$2 U$130.P$2
SCL27: J136.5 J137.5 J138.5 J139.5 J140.5 U$136.P$2 U$137.P$2 U$138.P$2 U$139.P$2 U$140.P$2
SCL28: J141.5 J142.5 J143.5 J144.5 J145.5 U$141.P$2 U$142.P$2 U$143.P$2 U$144.P$2 U$145.P$2
SDA: J1.6 J2.6 J3.6 J4.6 J5.6 U$1.P$1 U$2.P$1 U$3.P$1 U$4.P$1 U$5.P$1
SDA1: J6.6 J7.6 J8.6 J9.6 J10.6 U$6.P$1 U$7.P$1 U$8.P$1 U$9.P$1 U$10.P$1
SDA3: J16.6 J17.6 J18.6 J19.6 J20.6 U$16.P$1 U$17.P$1 U$18.P$1 U$19.P$1 U$20.P$1
SDA4: J21.6 J22.6 J23.6 J24.6 J25.6 U$21.P$1 U$22.P$1 U$23.P$1 U$24.P$1 U$25.P$1
SDA5: J26.6 J27.6 J28.6 J29.6 J30.6 U$26.P$1 U$27.P$1 U$28.P$1 U$29.P$1 U$30.P$1
SDA6: J31.6 J32.6 J33.6 J34.6 J35.6 U$31.P$1 U$32.P$1 U$33.P$1 U$34.P$1 U$35.P$1
SDA8: J41.6 J42.6 J43.6 J44.6 J45.6 U$41.P$1 U$42.P$1 U$43.P$1 U$44.P$1 U$45.P$1
SDA10: J51.6 J52.6 J53.6 J54.6 J55.6 U$51.P$1 U$52.P$1 U$53.P$1 U$54.P$1 U$55.P$1
SDA12: J61.6 J62.6 J63.6 J64.6 J65.6 U$61.P$1 U$62.P$1 U$63.P$1 U$64.P$1 U$65.P$1
SDA13: J66.6 J67.6 J68.6 J69.6 J70.6 U$66.P$1 U$67.P$1 U$68.P$1 U$69.P$1 U$70.P$1
SDA15: J76.6 J77.6 J78.6 J79.6 J80.6 U$76.P$1 U$77.P$1 U$78.P$1 U$79.P$1 U$80.P$1
SDA16: J81.6 J82.6 J83.6 J84.6 J85.6 U$81.P$1 U$82.P$1 U$83.P$1 U$84.P$1 U$85.P$1
SDA18: J91.6 J92.6 J93.6 J94.6 J95.6 U$91.P$1 U$92.P$1 U$93.P$1 U$94.P$1 U$95.P$1
SDA19: J96.6 J97.6 J98.6 J99.6 J100.6 U$96.P$1 U$97.P$1 U$98.P$1 U$99.P$1 U$100.P$1
SDA21: J106.6 J107.6 J108.6 J109.6 J110.6 U$106.P$1 U$107.P$1 U$108.P$1 U$109.P$1 U$110.P$1
SDA22: J111.6 J112.6 J113.6 J114.6 J115.6 U$111.P$1 U$112.P$1 U$113.P$1 U$114.P$1 U$115.P$1
SDA24: J121.6 J122.6 J123.6 J124.6 J125.6 U$121.P$1 U$122.P$1 U$123.P$1 U$124.P$1 U$125.P$1
SDA25: J126.6 J127.6 J128.6 J129.6 J130.6 U$126.P$1 U$127.P$1 U$128.P$1 U$129.P$1 U$130.P$1
SDA27: J136.6 J137.6 J138.6 J139.6 J140.6 U$136.P$1 U$137.P$1 U$138.P$1 U$139.P$1 U$140.P$1
SDA28: J141.6 J142.6 J143.6 J144.6 J145.6 U$141.P$1 U$142.P$1 U$143.P$1 U$144.P$1 U$145.P$1

## Tracks (layer width: path | path; a pad name or v marks a point on that pad's centre or on a via)
!SS1  (via drill 0.3)
  Top 0.152: v7.95,5.44 7.87,5.52 J1.4 7.87,7.39 8,7.52 16.28,7.52 16.28,6.66 J5.4 v16.24,5.54
  Bottom 0.152: v7.95,5.44 7.95,4.32 8.26,4.01 U$4.P$3 | U$5.P$3 16.64,4.28 16.26,4.66 16.26,5.53 v16.24,5.54
!SS2  (via drill 0.3)
  Top 0.152: v7.21,4.93 7.37,5.1 J1.3 7.36,7.31 7.88,7.82 16.41,7.82 16.72,7.51 24.38,7.51 24.64,7.25 J4.4 24.65,6.61 v24.65,5.56
  Bottom 0.152: v7.21,4.93 6.99,4.71 U$4.P$4 | U$3.P$3 25.02,4.43 24.66,4.78 24.66,5.55 v24.65,5.56
!SS3  (via drill 0.3)
  Top 0.152: v6.73,5.56 6.76,5.56 6.83,5.64 6.83,6.59 J1.2 6.87,7.25 7.12,7.51 7.13,7.51 7.75,8.13 16.53,8.13 16.85,7.81 24.5,7.81 24.81,7.51 32.76,7.51 33.02,7.25 J3.4 33.02,5.48 v33.01,5.47
  Bottom 0.152: v6.73,5.56 5.71,4.55 U$4.P$5 | v33.01,5.47 v33.02,5.46 33.02,4.72 33.53,4.21 U$2.P$3
!SS4  (via drill 0.3)
  Top 0.152: v5.77,5.66 6.07,5.66 6.37,5.97 J1.1 6.37,7.25 7.55,8.43 16.66,8.43 16.98,8.12 24.63,8.12 24.94,7.81 32.89,7.81 33.19,7.51 41.14,7.51 41.4,7.25 J2.4 v41.39,5.48
  Bottom 0.152: v5.77,5.66 4.45,4.34 U$4.P$6 | U$1.P$3 41.78,4.34 41.4,4.72 41.4,5.46 v41.39,5.48
!SS5  (via drill 0.3)
  Top 0.152: v56.46,5.44 56.38,5.52 J6.4 56.38,7.39 56.52,7.52 64.8,7.52 64.8,6.66 J10.4 64.76,6.62 v64.76,5.54
  Bottom 0.152: v56.46,5.44 56.46,4.32 56.77,4.01 U$6.P$3 | U$10.P$3 65.15,4.28 64.77,4.66 64.77,5.53 v64.76,5.54
!SS6  (via drill 0.3)
  Top 0.152: v55.72,4.93 55.88,5.1 J6.3 55.88,7.31 56.39,7.82 64.92,7.82 65.24,7.51 72.89,7.51 73.15,7.25 J9.4 73.17,6.61 v73.17,5.56
  Bottom 0.152: v55.72,4.93 55.5,4.71 U$6.P$4 | U$9.P$3 73.53,4.43 73.18,4.78 v73.18,5.55 v73.17,5.56
!SS7  (via drill 0.3)
  Top 0.152: v55.24,5.56 55.27,5.56 55.35,5.64 55.35,6.59 J6.2 55.38,7.25 55.64,7.51 56.26,8.13 65.05,8.13 65.36,7.81 73.02,7.81 73.32,7.51 81.28,7.51 81.54,7.25 J8.4 81.53,5.48 v81.52,5.47
  Bottom 0.152: v55.24,5.56 54.23,4.55 U$6.P$5 | v81.52,5.47 81.53,5.46 81.53,4.72 82.04,4.21 U$8.P$3
!SS8  (via drill 0.3)
  Top 0.152: v54.28,5.66 54.58,5.66 54.88,5.97 J6.1 54.88,7.25 56.06,8.43 65.17,8.43 65.49,8.12 73.14,8.12 73.45,7.81 81.4,7.81 81.71,7.51 89.66,7.51 89.92,7.25 J7.4 v89.9,5.48
  Bottom 0.152: v54.28,5.66 52.96,4.34 U$6.P$6 | U$7.P$3 90.3,4.34 89.92,4.72 89.92,5.46 v89.9,5.48
!SS13  (via drill 0.3)
  Top 0.152: v7.95,14.73 7.87,14.81 J16.4 7.87,16.68 8,16.82 16.28,16.82 16.28,15.96 J20.4 16.24,15.92 v16.24,14.83
  Bottom 0.152: v7.95,14.73 7.95,13.61 8.26,13.31 U$16.P$3 | U$20.P$3 16.64,13.57 16.26,13.95 16.26,14.82 v16.24,14.83
!SS14  (via drill 0.3)
  Top 0.152: v7.21,14.23 7.37,14.39 J16.3 7.36,16.61 7.88,17.12 16.41,17.12 16.72,16.8 24.38,16.8 24.64,16.54 J19.4 24.65,15.91 v24.65,14.86
  Bottom 0.152: v7.21,14.23 6.99,14.01 U$16.P$4 | U$19.P$3 25.02,13.72 24.66,14.08 24.66,14.85 v24.65,14.86
!SS15  (via drill 0.3)
  Top 0.152: v6.73,14.86 6.76,14.86 6.83,14.94 6.83,15.89 J16.2 6.87,16.55 7.12,16.8 7.13,16.8 7.75,17.42 16.53,17.42 16.85,17.11 24.5,17.11 24.81,16.8 32.76,16.8 33.02,16.54 J18.4 v33.02,14.78 v33.01,14.77
  Bottom 0.152: v6.73,14.86 5.71,13.84 U$16.P$5 | v33.01,14.77 v33.02,14.76 33.02,14.02 33.53,13.51 U$18.P$3
!SS16  (via drill 0.3)
  Top 0.152: v5.77,14.96 6.07,14.96 6.37,15.27 J16.1 6.37,16.55 7.55,17.73 16.66,17.73 16.98,17.41 24.63,17.41 24.94,17.11 32.89,17.11 33.19,16.8 41.14,16.8 41.4,16.54 J17.4 41.39,15.92 v41.39,14.77
  Bottom 0.152: v5.77,14.96 4.45,13.64 U$16.P$6 | U$17.P$3 41.78,13.64 41.4,14.02 41.4,14.76 v41.39,14.77
!SS17  (via drill 0.3)
  Top 0.152: v7.95,24.03 7.87,24.11 J21.4 7.87,25.98 8,26.11 16.28,26.11 16.28,25.25 J25.4 v16.24,24.13
  Bottom 0.152: v7.95,24.03 7.95,22.91 8.26,22.61 U$21.P$3 | U$25.P$3 16.64,22.87 16.26,23.25 16.26,24.12 v16.24,24.13
!SS18  (via drill 0.3)
  Top 0.152: v7.21,23.53 7.37,23.69 J21.3 7.36,25.91 7.88,26.42 16.41,26.42 16.72,26.1 24.38,26.1 24.64,25.84 J24.4 24.65,25.2 v24.65,24.16
  Bottom 0.152: v7.21,23.53 6.99,23.31 U$21.P$4 | U$24.P$3 25.02,23.02 24.66,23.38 24.66,24.14 v24.65,24.16
!SS19  (via drill 0.3)
  Top 0.152: v6.73,24.16 6.76,24.16 6.83,24.23 6.83,25.18 J21.2 6.87,25.84 7.12,26.1 7.13,26.1 7.75,26.72 16.53,26.72 16.85,26.41 24.5,26.41 24.81,26.1 32.76,26.1 33.02,25.84 J23.4 v33.02,24.07 v33.01,24.07
  Bottom 0.152: v6.73,24.16 5.71,23.14 U$21.P$5 | v33.01,24.07 33.02,24.05 33.02,23.31 33.53,22.81 U$23.P$3
!SS20  (via drill 0.3)
  Top 0.152: v5.77,24.26 6.07,24.26 6.37,24.56 J21.1 6.37,25.84 7.55,27.03 16.66,27.03 16.98,26.71 24.63,26.71 24.94,26.41 32.89,26.41 33.19,26.1 41.14,26.1 41.4,25.84 J22.4 v41.39,24.07
  Bottom 0.152: v5.77,24.26 4.45,22.94 U$21.P$6 | U$22.P$3 41.78,22.93 41.4,23.31 41.4,24.06 v41.39,24.07
!SS21  (via drill 0.3)
  Top 0.152: v7.95,33.33 7.87,33.41 J26.4 7.87,35.28 8,35.41 16.28,35.41 16.28,34.55 J30.4 v16.24,33.43
  Bottom 0.152: v7.95,33.33 7.95,32.21 8.26,31.9 U$26.P$3 | U$30.P$3 16.64,32.16 16.26,32.55 16.26,33.41 v16.24,33.43
!SS22  (via drill 0.3)
  Top 0.152: v7.21,32.82 7.37,32.99 J26.3 7.36,35.2 7.88,35.71 16.41,35.71 16.72,35.4 24.38,35.4 24.64,35.14 J29.4 24.65,34.5 v24.65,33.45
  Bottom 0.152: v7.21,32.82 6.99,32.6 U$26.P$4 | U$29.P$3 25.02,32.32 24.66,32.67 24.66,33.44 v24.65,33.45
!SS23  (via drill 0.3)
  Top 0.152: v6.73,33.45 6.76,33.45 6.83,33.53 6.83,34.48 J26.2 6.87,35.14 7.12,35.4 7.13,35.4 7.75,36.02 16.53,36.02 16.85,35.7 24.5,35.7 24.81,35.4 32.76,35.4 33.02,35.14 J28.4 33.02,33.37 v33.01,33.36
  Bottom 0.152: v6.73,33.45 5.71,32.44 U$26.P$5 | v33.01,33.36 v33.02,33.35 33.02,32.61 33.53,32.1 U$28.P$3
!SS24  (via drill 0.3)
  Top 0.152: v5.77,33.55 6.07,33.55 6.37,33.86 J26.1 6.37,35.14 7.55,36.32 16.66,36.32 16.98,36.01 24.63,36.01 24.94,35.7 32.89,35.7 33.19,35.4 41.14,35.4 41.4,35.14 J27.4 v41.39,33.37
  Bottom 0.152: v5.77,33.55 4.45,32.23 U$26.P$6 | U$27.P$3 41.78,32.23 41.4,32.61 41.4,33.35 v41.39,33.37
!SS25  (via drill 0.3)
  Top 0.152: v56.46,14.73 56.38,14.81 J31.4 56.38,16.68 56.52,16.82 64.8,16.82 64.8,15.96 J35.4 64.76,15.92 v64.76,14.83
  Bottom 0.152: v56.46,14.73 56.46,13.61 56.77,13.31 U$31.P$3 | U$35.P$3 65.15,13.57 64.77,13.95 v64.77,14.82 v64.76,14.83
!SS26  (via drill 0.3)
  Top 0.152: v55.72,14.23 55.88,14.39 J31.3 55.88,16.61 56.39,17.12 64.92,17.12 65.24,16.8 72.89,16.8 73.15,16.54 J34.4 73.17,15.91 v73.17,14.86
  Bottom 0.152: v55.72,14.23 55.5,14.01 U$31.P$4 | U$34.P$3 73.53,13.72 73.18,14.08 73.18,14.85 v73.17,14.86
!SS27  (via drill 0.3)
  Top 0.152: v55.24,14.86 55.27,14.86 55.35,14.94 55.35,15.89 J31.2 55.38,16.55 55.64,16.8 56.26,17.42 65.05,17.42 65.36,17.11 73.02,17.11 73.32,16.8 81.28,16.8 81.54,16.54 J33.4 v81.53,14.78 v81.52,14.77
  Bottom 0.152: v55.24,14.86 54.23,13.84 U$31.P$5 | v81.52,14.77 81.53,14.76 81.53,14.02 82.04,13.51 U$33.P$3
!SS28  (via drill 0.3)
  Top 0.152: v54.28,14.96 54.58,14.96 54.88,15.27 J31.1 54.88,16.55 56.06,17.73 65.17,17.73 65.49,17.41 73.14,17.41 73.45,17.11 81.4,17.11 81.71,16.8 89.66,16.8 89.92,16.54 J32.4 89.9,15.92 v89.9,14.77
  Bottom 0.152: v54.28,14.96 52.96,13.64 U$31.P$6 | U$32.P$3 90.3,13.64 89.92,14.02 89.92,14.76 v89.9,14.77
!SS33  (via drill 0.3)
  Top 0.152: v56.46,24.03 56.38,24.11 J41.4 56.38,25.98 56.52,26.11 64.8,26.11 64.8,25.25 J45.4 64.76,25.21 v64.76,24.13
  Bottom 0.152: v56.46,24.03 56.46,22.91 56.77,22.61 U$41.P$3 | U$45.P$3 65.15,22.87 64.77,23.25 64.77,24.12 v64.76,24.13
!SS34  (via drill 0.3)
  Top 0.152: v55.72,23.53 55.88,23.69 J41.3 55.88,25.91 56.39,26.42 64.92,26.42 65.24,26.1 72.89,26.1 73.15,25.84 J44.4 73.17,25.2 v73.17,24.16
  Bottom 0.152: v55.72,23.53 55.5,23.31 U$41.P$4 | U$44.P$3 73.53,23.02 73.18,23.38 73.18,24.14 v73.17,24.16
!SS35  (via drill 0.3)
  Top 0.152: v55.24,24.16 55.27,24.16 55.35,24.23 55.35,25.18 J41.2 55.38,25.84 55.64,26.1 56.26,26.72 65.05,26.72 65.36,26.41 73.02,26.41 73.32,26.1 81.28,26.1 81.54,25.84 J43.4 v81.53,24.07 v81.52,24.07
  Bottom 0.152: v55.24,24.16 54.23,23.14 U$41.P$5 | v81.52,24.07 81.53,24.05 81.53,23.31 82.04,22.81 U$43.P$3
!SS36  (via drill 0.3)
  Top 0.152: v54.28,24.26 54.58,24.26 54.88,24.56 J41.1 54.88,25.84 56.06,27.03 65.17,27.03 65.49,26.71 73.14,26.71 73.45,26.41 81.4,26.41 81.71,26.1 89.66,26.1 89.92,25.84 J42.4 v89.9,24.07
  Bottom 0.152: v54.28,24.26 52.96,22.94 U$41.P$6 | U$42.P$3 90.3,22.93 89.92,23.31 89.92,24.06 v89.9,24.07
!SS41  (via drill 0.3)
  Top 0.152: v56.46,33.33 56.38,33.41 J51.4 56.38,35.28 56.52,35.41 64.8,35.41 64.8,34.55 J55.4 64.76,34.51 v64.76,33.43
  Bottom 0.152: v56.46,33.33 56.46,32.21 56.77,31.9 U$51.P$3 | U$55.P$3 65.15,32.16 64.77,32.55 64.77,33.41 v64.76,33.43
!SS42  (via drill 0.3)
  Top 0.152: v55.72,32.82 55.88,32.99 J51.3 55.88,35.2 56.39,35.71 64.92,35.71 65.24,35.4 72.89,35.4 73.15,35.14 J54.4 73.17,34.5 v73.17,33.45
  Bottom 0.152: v55.72,32.82 55.5,32.6 U$51.P$4 | U$54.P$3 73.53,32.32 73.18,32.67 v73.18,33.44 v73.17,33.45
!SS43  (via drill 0.3)
  Top 0.152: v55.24,33.45 55.27,33.45 55.35,33.53 55.35,34.48 J51.2 55.38,35.14 55.64,35.4 56.26,36.02 65.05,36.02 65.36,35.7 73.02,35.7 73.32,35.4 81.28,35.4 81.54,35.14 J53.4 81.53,33.37 v81.52,33.36
  Bottom 0.152: v55.24,33.45 54.23,32.44 U$51.P$5 | v81.52,33.36 81.53,33.35 81.53,32.61 82.04,32.1 U$53.P$3
!SS44  (via drill 0.3)
  Top 0.152: v54.28,33.55 54.58,33.55 54.88,33.86 J51.1 54.88,35.14 56.06,36.32 65.17,36.32 65.49,36.01 73.14,36.01 73.45,35.7 81.4,35.7 81.71,35.4 89.66,35.4 89.92,35.14 J52.4 v89.9,33.37
  Bottom 0.152: v54.28,33.55 52.96,32.23 U$51.P$6 | U$52.P$3 90.3,32.23 89.92,32.61 89.92,33.35 v89.9,33.37
!SS49  (via drill 0.3)
  Top 0.152: v7.95,42.62 7.87,42.7 J61.4 7.87,44.57 8,44.7 16.28,44.7 16.28,43.84 J65.4 v16.24,42.72
  Bottom 0.152: v7.95,42.62 7.95,41.5 8.26,41.2 U$61.P$3 | U$65.P$3 16.64,41.46 16.26,41.84 16.26,42.71 v16.24,42.72
!SS50  (via drill 0.3)
  Top 0.152: v7.21,42.12 7.37,42.28 J61.3 7.36,44.5 7.88,45.01 16.41,45.01 16.72,44.69 24.38,44.69 24.64,44.43 J64.4 24.65,43.8 v24.65,42.75
  Bottom 0.152: v7.21,42.12 6.99,41.9 U$61.P$4 | U$64.P$3 25.02,41.61 24.66,41.97 24.66,42.74 v24.65,42.75
!SS51  (via drill 0.3)
  Top 0.152: v6.73,42.75 6.76,42.75 6.83,42.82 6.83,43.78 J61.2 6.87,44.44 7.12,44.69 7.13,44.69 7.75,45.31 16.53,45.31 16.85,45 24.5,45 24.81,44.69 32.76,44.69 33.02,44.43 J63.4 v33.02,42.67 v33.01,42.66
  Bottom 0.152: v6.73,42.75 5.71,41.73 U$61.P$5 | v33.01,42.66 33.02,42.65 33.02,41.91 33.53,41.4 U$63.P$3
!SS52  (via drill 0.3)
  Top 0.152: v5.77,42.85 6.07,42.85 6.37,43.16 J61.1 6.37,44.44 7.55,45.62 16.66,45.62 16.98,45.3 24.63,45.3 24.94,45 32.89,45 33.19,44.69 41.14,44.69 41.4,44.43 J62.4 v41.39,42.66
  Bottom 0.152: v5.77,42.85 4.45,41.53 U$61.P$6 | U$62.P$3 41.78,41.53 41.4,41.91 41.4,42.65 v41.39,42.66
!SS53  (via drill 0.3)
  Top 0.152: v56.46,42.62 56.38,42.7 J66.4 56.38,44.57 56.52,44.7 64.8,44.7 64.8,43.84 J70.4 64.76,43.81 v64.76,42.72
  Bottom 0.152: v56.46,42.62 56.46,41.5 56.77,41.2 U$66.P$3 | U$70.P$3 65.15,41.46 64.77,41.84 v64.77,42.71 v64.76,42.72
!SS54  (via drill 0.3)
  Top 0.152: v55.72,42.12 55.88,42.28 J66.3 55.88,44.5 56.39,45.01 64.92,45.01 65.24,44.69 72.89,44.69 73.15,44.43 J69.4 73.17,43.8 v73.17,42.75
  Bottom 0.152: v55.72,42.12 55.5,41.9 U$66.P$4 | U$69.P$3 73.53,41.61 73.18,41.97 73.18,42.74 v73.17,42.75
!SS55  (via drill 0.3)
  Top 0.152: v55.24,42.75 55.27,42.75 55.35,42.82 55.35,43.78 J66.2 55.38,44.44 55.64,44.69 56.26,45.31 65.05,45.31 65.36,45 73.02,45 73.32,44.69 81.28,44.69 81.54,44.43 J68.4 v81.53,42.67 v81.52,42.66
  Bottom 0.152: v55.24,42.75 54.23,41.73 U$66.P$5 | v81.52,42.66 81.53,42.65 81.53,41.91 82.04,41.4 U$68.P$3
!SS56  (via drill 0.3)
  Top 0.152: v54.28,42.85 54.58,42.85 54.88,43.16 J66.1 54.88,44.44 56.06,45.62 65.17,45.62 65.49,45.3 73.14,45.3 73.45,45 81.4,45 81.71,44.69 89.66,44.69 89.92,44.43 J67.4 v89.9,42.66
  Bottom 0.152: v54.28,42.85 52.96,41.53 U$66.P$6 | U$67.P$3 90.3,41.53 89.92,41.91 89.92,42.65 v89.9,42.66
!SS61  (via drill 0.3)
  Top 0.152: v7.95,51.92 7.87,52 J76.4 7.87,53.87 8,54 16.28,54 16.28,53.14 J80.4 v16.24,52.02
  Bottom 0.152: v7.95,51.92 7.95,50.8 8.26,50.49 U$76.P$3 | U$80.P$3 16.64,50.76 16.26,51.14 16.26,52.01 v16.24,52.02
!SS62  (via drill 0.3)
  Top 0.152: v7.21,51.42 7.37,51.58 J76.3 7.36,53.8 7.88,54.3 16.41,54.3 16.72,53.99 24.38,53.99 24.64,53.73 J79.4 24.65,53.09 v24.65,52.05
  Bottom 0.152: v7.21,51.42 6.99,51.2 U$76.P$4 | U$79.P$3 25.02,50.91 24.66,51.27 24.66,52.03 v24.65,52.05
!SS63  (via drill 0.3)
  Top 0.152: v6.73,52.05 6.76,52.05 6.83,52.12 6.83,53.07 J76.2 6.87,53.73 7.12,53.99 7.13,53.99 7.75,54.61 16.53,54.61 16.85,54.3 24.5,54.3 24.81,53.99 32.76,53.99 33.02,53.73 J78.4 v33.02,51.96 v33.01,51.96
  Bottom 0.152: v6.73,52.05 5.71,51.03 U$76.P$5 | v33.01,51.96 33.02,51.94 33.02,51.2 33.53,50.7 U$78.P$3
!SS64  (via drill 0.3)
  Top 0.152: v5.77,52.15 6.07,52.15 6.37,52.45 J76.1 6.37,53.73 7.55,54.91 16.66,54.91 16.98,54.6 24.63,54.6 24.94,54.3 32.89,54.3 33.19,53.99 41.14,53.99 41.4,53.73 J77.4 v41.39,51.96
  Bottom 0.152: v5.77,52.15 4.45,50.83 U$76.P$6 | U$77.P$3 41.78,50.82 41.4,51.2 41.4,51.95 v41.39,51.96
!SS65  (via drill 0.3)
  Top 0.152: v56.46,51.92 56.38,52 J81.4 56.38,53.87 56.52,54 64.8,54 64.8,53.14 J85.4 64.76,53.1 v64.76,52.02
  Bottom 0.152: v56.46,51.92 56.46,50.8 56.77,50.49 U$81.P$3 | U$85.P$3 65.15,50.76 64.77,51.14 64.77,52.01 v64.76,52.02
!SS66  (via drill 0.3)
  Top 0.152: v55.72,51.42 55.88,51.58 J81.3 55.88,53.8 56.39,54.3 64.92,54.3 65.24,53.99 72.89,53.99 73.15,53.73 J84.4 73.17,53.09 v73.17,52.05
  Bottom 0.152: v55.72,51.42 55.5,51.2 U$81.P$4 | U$84.P$3 73.53,50.91 73.18,51.27 v73.18,52.03 v73.17,52.05
!SS67  (via drill 0.3)
  Top 0.152: v55.24,52.05 55.27,52.05 55.35,52.12 55.35,53.07 J81.2 55.38,53.73 55.64,53.99 56.26,54.61 65.05,54.61 65.36,54.3 73.02,54.3 73.32,53.99 81.28,53.99 81.54,53.73 J83.4 v81.53,51.96 v81.52,51.96
  Bottom 0.152: v55.24,52.05 54.23,51.03 U$81.P$5 | v81.52,51.96 81.53,51.94 81.53,51.2 82.04,50.7 U$83.P$3
!SS68  (via drill 0.3)
  Top 0.152: v54.28,52.15 54.58,52.15 54.88,52.45 J81.1 54.88,53.73 56.06,54.91 65.17,54.91 65.49,54.6 73.14,54.6 73.45,54.3 81.4,54.3 81.71,53.99 89.66,53.99 89.92,53.73 J82.4 v89.9,51.96
  Bottom 0.152: v54.28,52.15 52.96,50.83 U$81.P$6 | U$82.P$3 90.3,50.82 89.92,51.2 89.92,51.95 v89.9,51.96
!SS73  (via drill 0.3)
  Top 0.152: v7.95,61.21 7.87,61.29 J91.4 7.87,63.17 8,63.3 16.28,63.3 16.28,62.44 J95.4 v16.24,61.32
  Bottom 0.152: v7.95,61.21 7.95,60.1 8.26,59.79 U$91.P$3 | U$95.P$3 16.64,60.05 16.26,60.43 16.26,61.3 v16.24,61.32
!SS74  (via drill 0.3)
  Top 0.152: v7.21,60.71 7.37,60.88 J91.3 7.36,63.09 7.88,63.6 16.41,63.6 16.72,63.29 24.38,63.29 24.64,63.02 J94.4 24.65,62.39 v24.65,61.34
  Bottom 0.152: v7.21,60.71 6.99,60.49 U$91.P$4 | U$94.P$3 25.02,60.21 24.66,60.56 24.66,61.33 v24.65,61.34
!SS75  (via drill 0.3)
  Top 0.152: v6.73,61.34 6.76,61.34 6.83,61.42 6.83,62.37 J91.2 6.87,63.03 7.12,63.29 7.13,63.29 7.75,63.91 16.53,63.91 16.85,63.59 24.5,63.59 24.81,63.29 32.76,63.29 33.02,63.02 J93.4 33.02,61.26 v33.01,61.25
  Bottom 0.152: v6.73,61.34 5.71,60.33 U$91.P$5 | v33.01,61.25 v33.02,61.24 33.02,60.5 33.53,59.99 U$93.P$3
!SS76  (via drill 0.3)
  Top 0.152: v5.77,61.44 6.07,61.44 6.37,61.75 J91.1 6.37,63.03 7.55,64.21 16.66,64.21 16.98,63.9 24.63,63.9 24.94,63.59 32.89,63.59 33.19,63.29 41.14,63.29 41.4,63.02 J92.4 v41.39,61.25
  Bottom 0.152: v5.77,61.44 4.45,60.12 U$91.P$6 | U$92.P$3 41.78,60.12 41.4,60.5 41.4,61.24 v41.39,61.25
!SS77  (via drill 0.3)
  Top 0.152: v56.46,61.21 56.38,61.29 J96.4 56.38,63.17 56.52,63.3 64.8,63.3 64.8,62.44 J100.4 64.76,62.4 v64.76,61.32
  Bottom 0.152: v56.46,61.21 56.46,60.1 56.77,59.79 U$96.P$3 | U$100.P$3 65.15,60.05 64.77,60.43 64.77,61.3 v64.76,61.32
!SS78  (via drill 0.3)
  Top 0.152: v55.72,60.71 55.88,60.88 J96.3 55.88,63.09 56.39,63.6 64.92,63.6 65.24,63.29 72.89,63.29 73.15,63.02 J99.4 73.17,62.39 v73.17,61.34
  Bottom 0.152: v55.72,60.71 55.5,60.49 U$96.P$4 | U$99.P$3 73.53,60.21 73.18,60.56 v73.18,61.33 v73.17,61.34
!SS79  (via drill 0.3)
  Top 0.152: v55.24,61.34 55.27,61.34 55.35,61.42 55.35,62.37 J96.2 55.38,63.03 55.64,63.29 56.26,63.91 65.05,63.91 65.36,63.59 73.02,63.59 73.32,63.29 81.28,63.29 81.54,63.02 J98.4 81.53,61.26 v81.52,61.25
  Bottom 0.152: v55.24,61.34 54.23,60.33 U$96.P$5 | v81.52,61.25 81.53,61.24 81.53,60.5 82.04,59.99 U$98.P$3
!SS80  (via drill 0.3)
  Top 0.152: v54.28,61.44 54.58,61.44 54.88,61.75 J96.1 54.88,63.03 56.06,64.21 65.17,64.21 65.49,63.9 73.14,63.9 73.45,63.59 81.4,63.59 81.71,63.29 89.66,63.29 89.92,63.02 J97.4 v89.9,61.25
  Bottom 0.152: v54.28,61.44 52.96,60.12 U$96.P$6 | U$97.P$3 90.3,60.12 89.92,60.5 89.92,61.24 v89.9,61.25
!SS85  (via drill 0.3)
  Top 0.152: v7.95,70.51 7.87,70.59 J106.4 7.87,72.46 8,72.59 16.28,72.59 16.28,71.73 J110.4 v16.24,70.61
  Bottom 0.152: v7.95,70.51 7.95,69.39 8.26,69.09 U$106.P$3 | U$110.P$3 16.64,69.35 16.26,69.73 16.26,70.6 v16.24,70.61
!SS86  (via drill 0.3)
  Top 0.152: v7.21,70.01 7.37,70.17 J106.3 7.36,72.39 7.88,72.9 16.41,72.9 16.72,72.58 24.38,72.58 24.64,72.32 J109.4 24.65,71.69 v24.65,70.64
  Bottom 0.152: v7.21,70.01 6.99,69.79 U$106.P$4 | U$109.P$3 25.02,69.5 24.66,69.86 24.66,70.62 v24.65,70.64
!SS87  (via drill 0.3)
  Top 0.152: v6.73,70.64 6.76,70.64 6.83,70.71 6.83,71.67 J106.2 6.87,72.33 7.12,72.58 7.13,72.58 7.75,73.2 16.53,73.2 16.85,72.89 24.5,72.89 24.81,72.58 32.76,72.58 33.02,72.32 J108.4 v33.02,70.56 v33.01,70.55
  Bottom 0.152: v6.73,70.64 5.71,69.62 U$106.P$5 | v33.01,70.55 33.02,70.54 33.02,69.8 33.53,69.29 U$108.P$3
!SS88  (via drill 0.3)
  Top 0.152: v5.77,70.74 6.07,70.74 6.37,71.04 J106.1 6.37,72.33 7.55,73.51 16.66,73.51 16.98,73.19 24.63,73.19 24.94,72.89 32.89,72.89 33.19,72.58 41.14,72.58 41.4,72.32 J107.4 v41.39,70.55
  Bottom 0.152: v5.77,70.74 4.45,69.42 U$106.P$6 | U$107.P$3 41.78,69.42 41.4,69.8 41.4,70.54 v41.39,70.55
!SS89  (via drill 0.3)
  Top 0.152: v56.46,70.51 56.38,70.59 J111.4 56.38,72.46 56.52,72.59 64.8,72.59 64.8,71.73 J115.4 64.76,71.7 v64.76,70.61
  Bottom 0.152: v56.46,70.51 56.46,69.39 56.77,69.09 U$111.P$3 | U$115.P$3 65.15,69.35 64.77,69.73 v64.77,70.6 v64.76,70.61
!SS90  (via drill 0.3)
  Top 0.152: v55.72,70.01 55.88,70.17 J111.3 55.88,72.39 56.39,72.9 64.92,72.9 65.24,72.58 72.89,72.58 73.15,72.32 J114.4 73.17,71.69 v73.17,70.64
  Bottom 0.152: v55.72,70.01 55.5,69.79 U$111.P$4 | U$114.P$3 73.53,69.5 73.18,69.86 73.18,70.62 v73.17,70.64
!SS91  (via drill 0.3)
  Top 0.152: v55.24,70.64 55.27,70.64 55.35,70.71 55.35,71.67 J111.2 55.38,72.33 55.64,72.58 56.26,73.2 65.05,73.2 65.36,72.89 73.02,72.89 73.32,72.58 81.28,72.58 81.54,72.32 J113.4 v81.53,70.56 v81.52,70.55
  Bottom 0.152: v55.24,70.64 54.23,69.62 U$111.P$5 | v81.52,70.55 81.53,70.54 81.53,69.8 82.04,69.29 U$113.P$3
!SS92  (via drill 0.3)
  Top 0.152: v54.28,70.74 54.58,70.74 54.88,71.04 J111.1 54.88,72.33 56.06,73.51 65.17,73.51 65.49,73.19 73.14,73.19 73.45,72.89 81.4,72.89 81.71,72.58 89.66,72.58 89.92,72.32 J112.4 v89.9,70.55
  Bottom 0.152: v54.28,70.74 52.96,69.42 U$111.P$6 | U$112.P$3 90.3,69.42 89.92,69.8 89.92,70.54 v89.9,70.55
!SS97  (via drill 0.3)
  Top 0.152: v7.95,79.81 7.87,79.89 J121.4 7.87,81.76 8,81.89 16.28,81.89 16.28,81.03 J125.4 v16.24,79.91
  Bottom 0.152: v7.95,79.81 7.95,78.69 8.26,78.38 U$121.P$3 | U$125.P$3 16.64,78.65 16.26,79.03 16.26,79.9 v16.24,79.91
!SS98  (via drill 0.3)
  Top 0.152: v7.21,79.31 7.37,79.47 J121.3 7.36,81.68 7.88,82.19 16.41,82.19 16.72,81.88 24.38,81.88 24.64,81.62 J124.4 24.65,80.98 v24.65,79.93
  Bottom 0.152: v7.21,79.31 6.99,79.08 U$121.P$4 | U$124.P$3 25.02,78.8 24.66,79.15 24.66,79.92 v24.65,79.93
!SS99  (via drill 0.3)
  Top 0.152: v6.73,79.93 6.76,79.93 6.83,80.01 6.83,80.96 J121.2 6.87,81.62 7.12,81.88 7.13,81.88 7.75,82.5 16.53,82.5 16.85,82.18 24.5,82.18 24.81,81.88 32.76,81.88 33.02,81.62 J123.4 v33.02,79.85 v33.01,79.85
  Bottom 0.152: v6.73,79.93 5.71,78.92 U$121.P$5 | v33.01,79.85 33.02,79.83 33.02,79.09 33.53,78.58 U$123.P$3
!SS100  (via drill 0.3)
  Top 0.152: v5.77,80.03 6.07,80.03 6.37,80.34 J121.1 6.37,81.62 7.55,82.8 16.66,82.8 16.98,82.49 24.63,82.49 24.94,82.18 32.89,82.18 33.19,81.88 41.14,81.88 41.4,81.62 J122.4 v41.39,79.85
  Bottom 0.152: v5.77,80.03 4.45,78.72 U$121.P$6 | U$122.P$3 41.78,78.71 41.4,79.09 41.4,79.83 v41.39,79.85
!SS101  (via drill 0.3)
  Top 0.152: v56.46,79.81 56.38,79.89 J126.4 56.38,81.76 56.52,81.89 64.8,81.89 64.8,81.03 J130.4 64.76,80.99 v64.76,79.91
  Bottom 0.152: v56.46,79.81 56.46,78.69 56.77,78.38 U$126.P$3 | U$130.P$3 65.15,78.65 64.77,79.03 64.77,79.9 v64.76,79.91
!SS102  (via drill 0.3)
  Top 0.152: v55.72,79.31 55.88,79.47 J126.3 55.88,81.68 56.39,82.19 64.92,82.19 65.24,81.88 72.89,81.88 73.15,81.62 J129.4 73.17,80.98 v73.17,79.93
  Bottom 0.152: v55.72,79.31 55.5,79.08 U$126.P$4 | U$129.P$3 73.53,78.8 73.18,79.15 v73.18,79.92 v73.17,79.93
!SS103  (via drill 0.3)
  Top 0.152: v55.24,79.93 55.27,79.93 55.35,80.01 55.35,80.96 J126.2 55.38,81.62 55.64,81.88 56.26,82.5 65.05,82.5 65.36,82.18 73.02,82.18 73.32,81.88 81.28,81.88 81.54,81.62 J128.4 v81.53,79.85 v81.52,79.85
  Bottom 0.152: v55.24,79.93 54.23,78.92 U$126.P$5 | v81.52,79.85 81.53,79.83 81.53,79.09 82.04,78.58 U$128.P$3
!SS104  (via drill 0.3)
  Top 0.152: v54.28,80.03 54.58,80.03 54.88,80.34 J126.1 54.88,81.62 56.06,82.8 65.17,82.8 65.49,82.49 73.14,82.49 73.45,82.18 81.4,82.18 81.71,81.88 89.66,81.88 89.92,81.62 J127.4 v89.9,79.85
  Bottom 0.152: v54.28,80.03 52.96,78.72 U$126.P$6 | U$127.P$3 90.3,78.71 89.92,79.09 89.92,79.83 v89.9,79.85
!SS109  (via drill 0.3)
  Top 0.152: v7.95,89.1 7.87,89.18 J136.4 7.87,91.06 8,91.19 16.28,91.19 16.28,90.33 J140.4 v16.24,89.2
  Bottom 0.152: v7.95,89.1 7.95,87.99 8.26,87.68 U$136.P$3 | U$140.P$3 16.64,87.94 16.26,88.32 16.26,89.19 v16.24,89.2
!SS110  (via drill 0.3)
  Top 0.152: v7.21,88.6 7.37,88.77 J136.3 7.36,90.98 7.88,91.49 16.41,91.49 16.72,91.18 24.38,91.18 24.64,90.92 J139.4 24.65,90.28 v24.65,89.23
  Bottom 0.152: v7.21,88.6 6.99,88.38 U$136.P$4 | U$139.P$3 25.02,88.09 24.66,88.45 24.66,89.22 v24.65,89.23
!SS111  (via drill 0.3)
  Top 0.152: v6.73,89.23 6.76,89.23 6.83,89.31 6.83,90.26 J136.2 6.87,90.92 7.12,91.18 7.13,91.18 7.75,91.8 16.53,91.8 16.85,91.48 24.5,91.48 24.81,91.18 32.76,91.18 33.02,90.92 J138.4 v33.02,89.15 v33.01,89.14
  Bottom 0.152: v6.73,89.23 5.71,88.21 U$136.P$5 | v33.01,89.14 v33.02,89.13 33.02,88.39 33.53,87.88 U$138.P$3
!SS112  (via drill 0.3)
  Top 0.152: v5.77,89.33 6.07,89.33 6.37,89.64 J136.1 6.37,90.92 7.55,92.1 16.66,92.1 16.98,91.78 24.63,91.78 24.94,91.48 32.89,91.48 33.19,91.18 41.14,91.18 41.4,90.92 J137.4 v41.39,89.14
  Bottom 0.152: v5.77,89.33 4.45,88.01 U$136.P$6 | U$137.P$3 41.78,88.01 41.4,88.39 41.4,89.13 v41.39,89.14
!SS113  (via drill 0.3)
  Top 0.152: v56.46,89.1 56.38,89.18 J141.4 56.38,91.06 56.52,91.19 64.8,91.19 64.8,90.33 J145.4 64.76,90.29 v64.76,89.2
  Bottom 0.152: v56.46,89.1 56.46,87.99 56.77,87.68 U$141.P$3 | U$145.P$3 65.15,87.94 64.77,88.32 v64.77,89.19 v64.76,89.2
!SS114  (via drill 0.3)
  Top 0.152: v55.72,88.6 55.88,88.77 J141.3 55.88,90.98 56.39,91.49 64.92,91.49 65.24,91.18 72.89,91.18 73.15,90.92 J144.4 73.17,90.28 v73.17,89.23
  Bottom 0.152: v55.72,88.6 55.5,88.38 U$141.P$4 | U$144.P$3 73.53,88.09 73.18,88.45 73.18,89.22 v73.17,89.23
!SS115  (via drill 0.3)
  Top 0.152: v55.24,89.23 55.27,89.23 55.35,89.31 55.35,90.26 J141.2 55.38,90.92 55.64,91.18 56.26,91.8 65.05,91.8 65.36,91.48 73.02,91.48 73.32,91.18 81.28,91.18 81.54,90.92 J143.4 v81.53,89.15 v81.52,89.14
  Bottom 0.152: v55.24,89.23 54.23,88.21 U$141.P$5 | v81.52,89.14 81.53,89.13 81.53,88.39 82.04,87.88 U$143.P$3
!SS116  (via drill 0.3)
  Top 0.152: v54.28,89.33 54.58,89.33 54.88,89.64 J141.1 54.88,90.92 56.06,92.1 65.17,92.1 65.49,91.78 73.14,91.78 73.45,91.48 81.4,91.48 81.71,91.18 89.66,91.18 89.92,90.92 J142.4 v89.9,89.14
  Bottom 0.152: v54.28,89.33 52.96,88.01 U$141.P$6 | U$142.P$3 90.3,88.01 89.92,88.39 89.92,89.13 v89.9,89.14
GND
  pour Top: 0,0 48.51,0 48.51,9.3 0,9.3
  pour Bottom: 0,0 48.51,0 48.51,9.3 0,9.3
GND1
  pour Top: 48.51,0 97.03,0 97.03,9.3 48.51,9.3
  pour Bottom: 48.51,0 97.03,0 97.03,9.3 48.51,9.3
GND3
  pour Top: 0,9.3 48.51,9.3 48.51,18.59 0,18.59
  pour Bottom: 0,9.3 48.51,9.3 48.51,18.59 0,18.59
GND4
  pour Top: 0,18.59 48.51,18.59 48.51,27.89 0,27.89
  pour Bottom: 0,18.59 48.51,18.59 48.51,27.89 0,27.89
GND5
  pour Top: 0,27.89 48.51,27.89 48.51,37.19 0,37.19
  pour Bottom: 0,27.89 48.51,27.89 48.51,37.19 0,37.19
GND6
  pour Top: 48.51,9.3 97.03,9.3 97.03,18.59 48.51,18.59
  pour Bottom: 48.51,9.3 97.03,9.3 97.03,18.59 48.51,18.59
GND8
  pour Top: 48.51,18.59 97.03,18.59 97.03,27.89 48.51,27.89
  pour Bottom: 48.51,18.59 97.03,18.59 97.03,27.89 48.51,27.89
GND10
  pour Top: 48.51,27.89 97.03,27.89 97.03,37.19 48.51,37.19
  pour Bottom: 48.51,27.89 97.03,27.89 97.03,37.19 48.51,37.19
GND12
  pour Top: 0,37.19 48.51,37.19 48.51,46.48 0,46.48
  pour Bottom: 0,37.19 48.51,37.19 48.51,46.48 0,46.48
GND13
  pour Top: 48.51,37.19 97.03,37.19 97.03,46.48 48.51,46.48
  pour Bottom: 48.51,37.19 97.03,37.19 97.03,46.48 48.51,46.48
GND15
  pour Top: 0,46.48 48.51,46.48 48.51,55.78 0,55.78
  pour Bottom: 0,46.48 48.51,46.48 48.51,55.78 0,55.78
GND16
  pour Top: 48.51,46.48 97.03,46.48 97.03,55.78 48.51,55.78
  pour Bottom: 48.51,46.48 97.03,46.48 97.03,55.78 48.51,55.78
GND18
  pour Top: 0,55.78 48.51,55.78 48.51,65.07 0,65.07
  pour Bottom: 0,55.78 48.51,55.78 48.51,65.07 0,65.07
GND19
  pour Top: 48.51,55.78 97.03,55.78 97.03,65.07 48.51,65.07
  pour Bottom: 48.51,55.78 97.03,55.78 97.03,65.07 48.51,65.07
GND21
  pour Top: 0,65.07 48.51,65.07 48.51,74.37 0,74.37
  pour Bottom: 0,65.07 48.51,65.07 48.51,74.37 0,74.37
GND22
  pour Top: 48.51,65.07 97.03,65.07 97.03,74.37 48.51,74.37
  pour Bottom: 48.51,65.07 97.03,65.07 97.03,74.37 48.51,74.37
GND24
  pour Top: 0,74.37 48.51,74.37 48.51,83.67 0,83.67
  pour Bottom: 0,74.37 48.51,74.37 48.51,83.67 0,83.67
GND25
  pour Top: 48.51,74.37 97.03,74.37 97.03,83.67 48.51,83.67
  pour Bottom: 48.51,74.37 97.03,74.37 97.03,83.67 48.51,83.67
GND27
  pour Top: 0,83.67 48.51,83.67 48.51,92.96 0,92.96
  pour Bottom: 0,83.67 48.51,83.67 48.51,92.96 0,92.96
GND28
  pour Top: 48.51,83.67 97.03,83.67 97.03,92.96 48.51,92.96
  pour Bottom: 48.51,83.67 97.03,83.67 97.03,92.96 48.51,92.96
SCL  (via drill 0.3)  (1 unrouted)
  Top 0.152: J1.5 8.37,5.77 8.48,5.66 v8.48,4.89 16.77,4.89 v16.79,4.88 | v16.79,4.88 16.78,4.89 16.78,6.6 J5.5 | v25.2,5 25.18,5.02 25.18,6.58 J4.5 | 33.54,4.95 33.54,6.6 J3.5 | J2.5 41.9,6.6 41.92,6.58 41.92,4.96 | v41.94,4.94 41.92,4.96 | v16.79,4.88 25.07,4.88 v25.2,5 | v25.2,5 25.23,5 25.33,4.9 33.51,4.9 v33.55,4.94 41.91,4.94 41.92,4.96
  Bottom 0.152: U$4.P$2 8.74,3.1 8.74,3.96 8.48,4.22 v8.48,4.89 | U$5.P$2 17.91,3.88 16.92,4.88 v16.79,4.88 | U$3.P$2 26.29,3.7 25.2,4.79 v25.2,5 | U$2.P$2 34.8,3.73 33.59,4.94 v33.55,4.94 | U$1.P$2 43.05,3.83 v41.94,4.94
SCL1  (via drill 0.3)  (1 unrouted)
  Top 0.152: J6.5 56.88,5.77 57,5.66 v57,4.89 v65.29,4.89 v65.3,4.88 | v65.3,4.88 v65.29,4.89 65.29,6.6 J10.5 | v73.71,5 73.7,5.02 73.7,6.58 J9.5 | 82.06,4.95 82.06,6.6 J8.5 | J7.5 90.41,6.6 90.44,6.58 90.44,4.96 | v90.45,4.94 90.44,4.96 | v65.3,4.88 73.58,4.88 v73.71,5 | v73.71,5 73.74,5 73.84,4.9 82.03,4.9 v82.07,4.94 90.42,4.94 90.44,4.96
  Bottom 0.152: U$6.P$2 57.25,3.1 57.25,3.96 57,4.22 v57,4.89 | U$10.P$2 66.42,3.88 65.43,4.88 v65.3,4.88 | U$9.P$2 74.8,3.7 73.71,4.79 v73.71,5 | U$8.P$2 83.31,3.73 82.1,4.94 v82.07,4.94 | U$7.P$2 91.57,3.83 v90.45,4.94
SCL3  (via drill 0.3)  (1 unrouted)
  Top 0.152: J16.5 8.37,15.07 8.48,14.95 v8.48,14.19 16.77,14.19 v16.79,14.17 | v16.79,14.17 16.78,14.19 16.78,15.9 J20.5 | v25.2,14.3 25.18,14.31 25.18,15.88 J19.5 | v33.54,14.25 33.54,15.9 J18.5 | J17.5 41.9,15.9 41.92,15.88 41.92,14.25 | v41.94,14.24 41.92,14.25 | v16.79,14.17 25.07,14.17 v25.2,14.3 | v25.2,14.3 25.23,14.3 25.33,14.2 33.51,14.2 v33.55,14.24 41.91,14.24 41.92,14.25
  Bottom 0.152: U$16.P$2 8.74,12.39 8.74,13.26 8.48,13.51 v8.48,14.19 | U$20.P$2 17.91,13.18 16.92,14.17 v16.79,14.17 | U$19.P$2 26.29,13 25.2,14.09 v25.2,14.3 | U$18.P$2 34.8,13.03 33.59,14.24 v33.55,14.24 | U$17.P$2 43.05,13.12 v41.94,14.24
SCL4  (via drill 0.3)  (1 unrouted)
  Top 0.152: J21.5 8.37,24.36 8.48,24.25 v8.48,23.48 16.77,23.48 v16.79,23.47 | v16.79,23.47 16.78,23.48 16.78,25.2 J25.5 | v25.2,23.6 25.18,23.61 25.18,25.17 J24.5 | 33.54,23.55 33.54,25.2 J23.5 | J22.5 41.9,25.2 41.92,25.17 41.92,23.55 | v41.94,23.54 41.92,23.55 | v16.79,23.47 25.07,23.47 v25.2,23.6 | v25.2,23.6 25.23,23.6 25.33,23.5 33.51,23.5 v33.55,23.54 41.91,23.54 41.92,23.55